# Altium PCB SAMV71_Xplained_Ultra.PcbDoc (part 1 of 7)
Units mm, origin at the board's own origin, x right, y up, seen from the top; angles counter-clockwise.
Board outline 90 x 135 mm, 8 copper layers (Top Layer LF-Signals, Ground Plane 1 (GND), Power Plane (VCC), Ground Plane 2 (GND), Signal Layer 1, Signal Layer 2, Ground Plane 3 (GND), Bottom Layer LF-Signals), stack 1.588 mm thick; 391 components, 330 nets, 1782 pads, 966 vias.
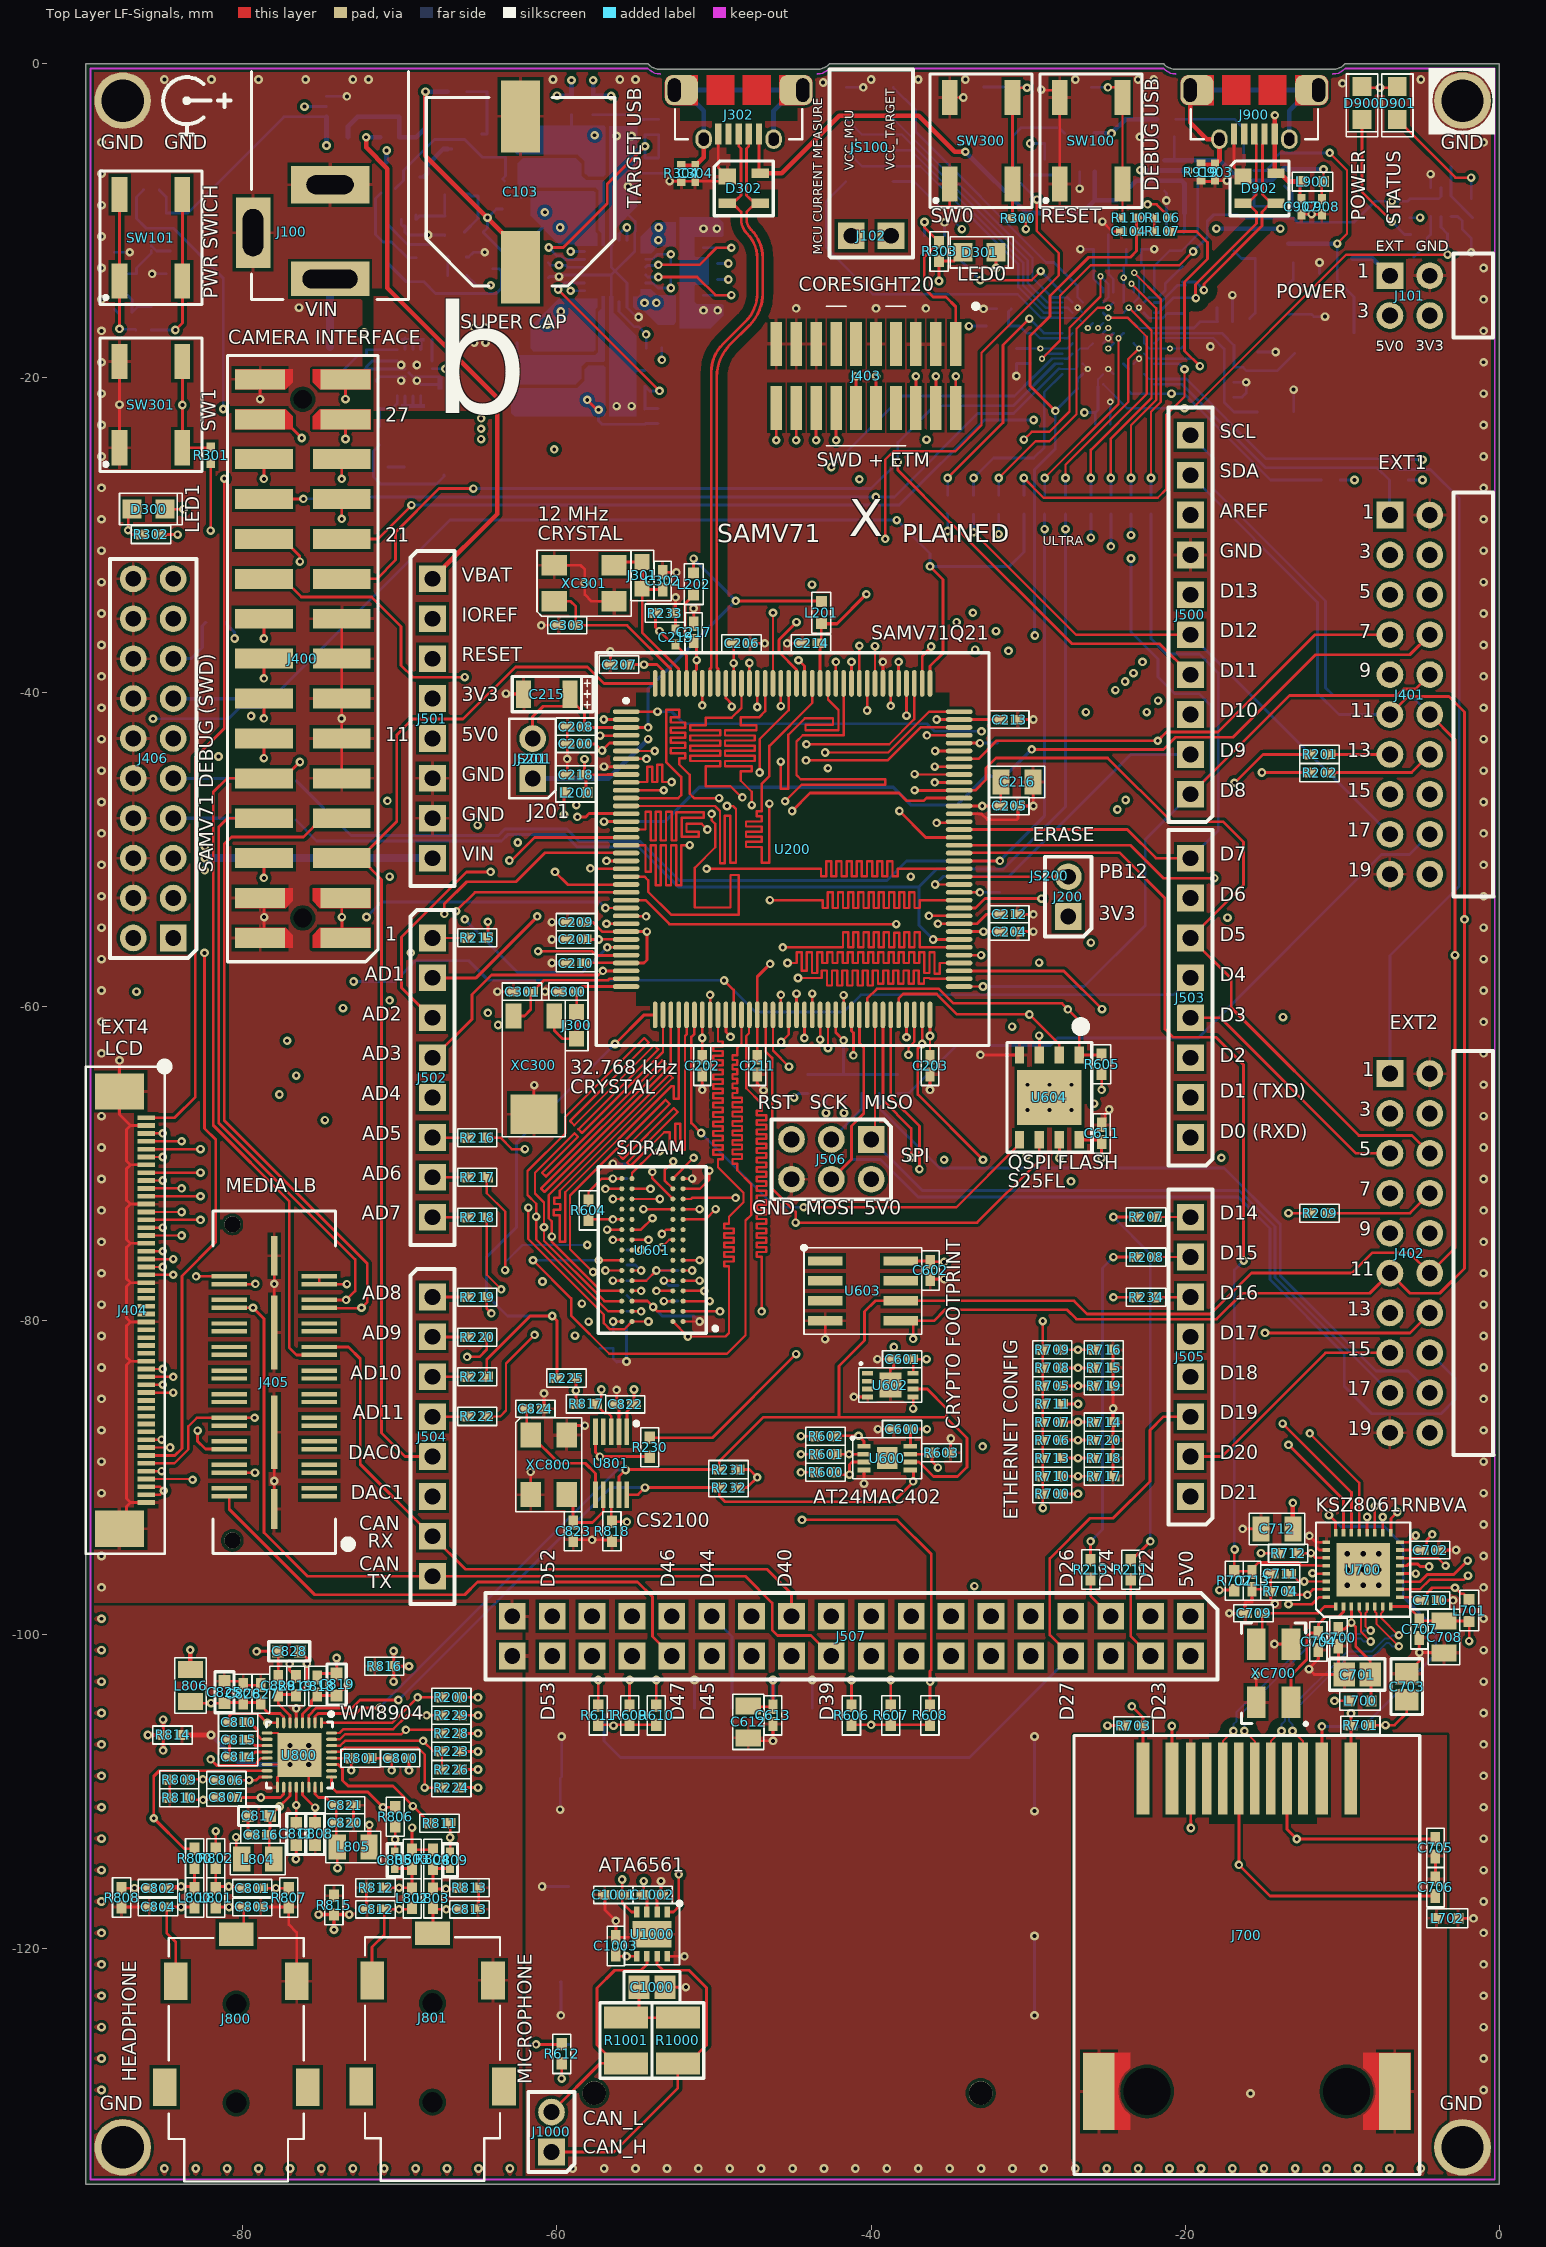
[diagram p0: Top Layer LF-Signals view]
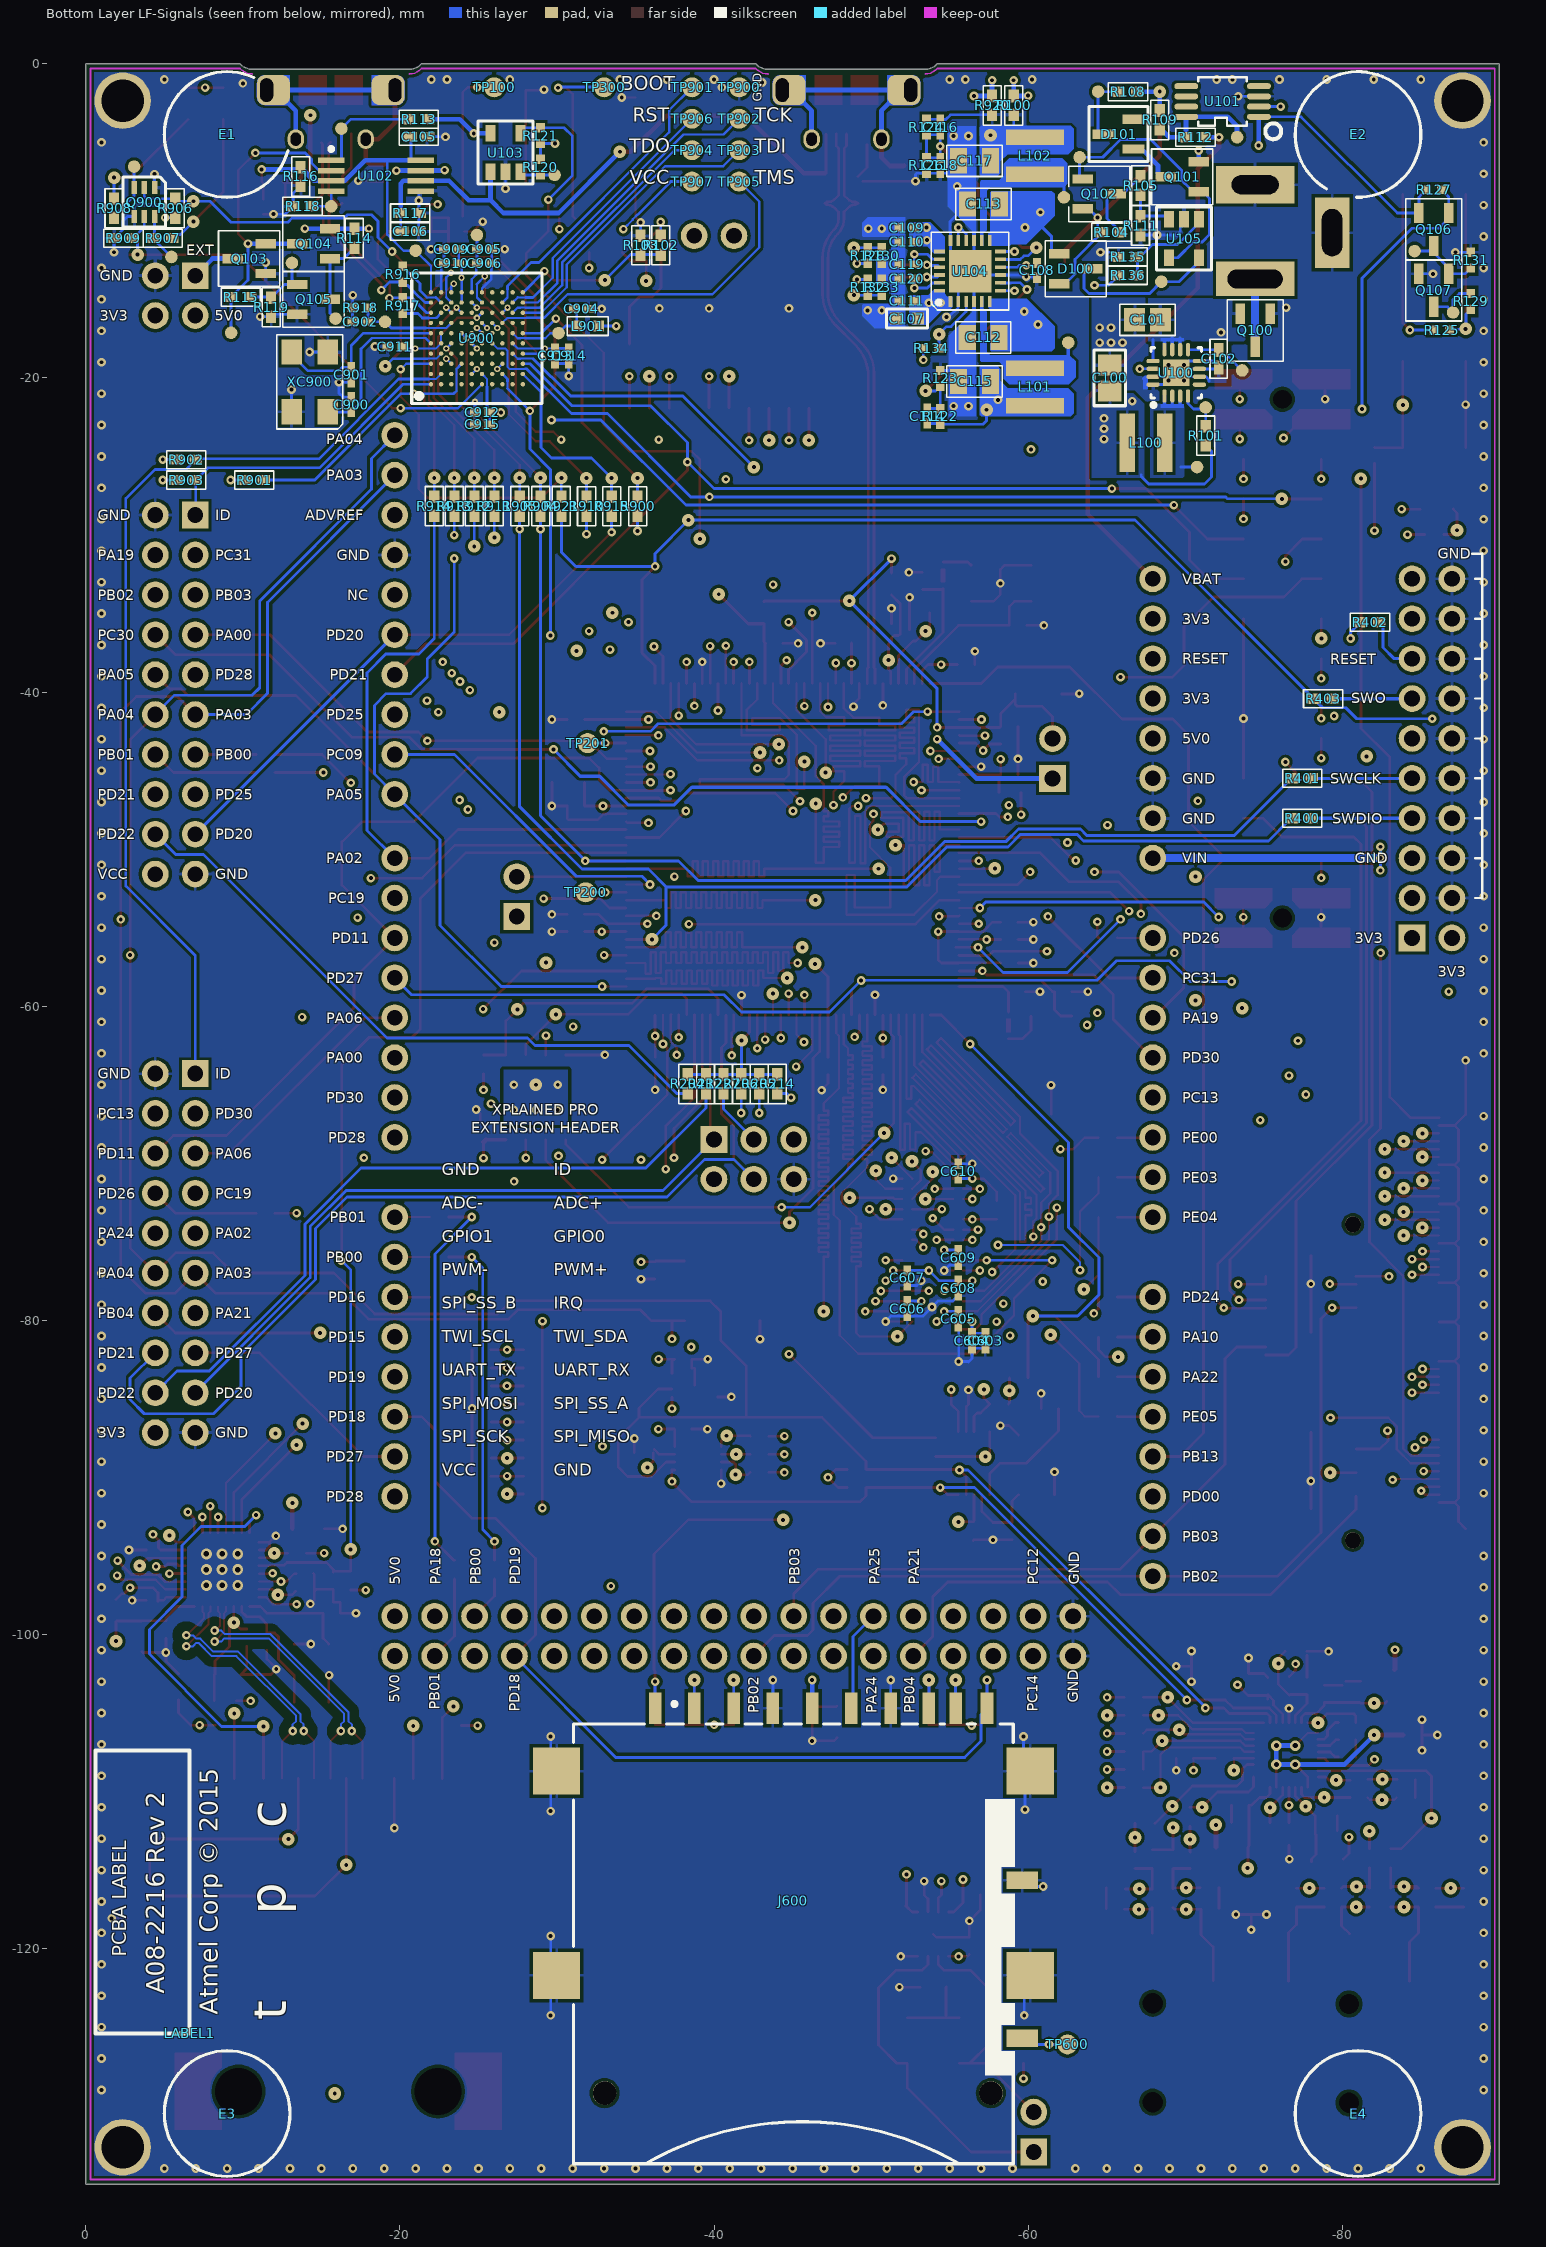
[diagram p1: Bottom Layer LF-Signals view, seen from below]
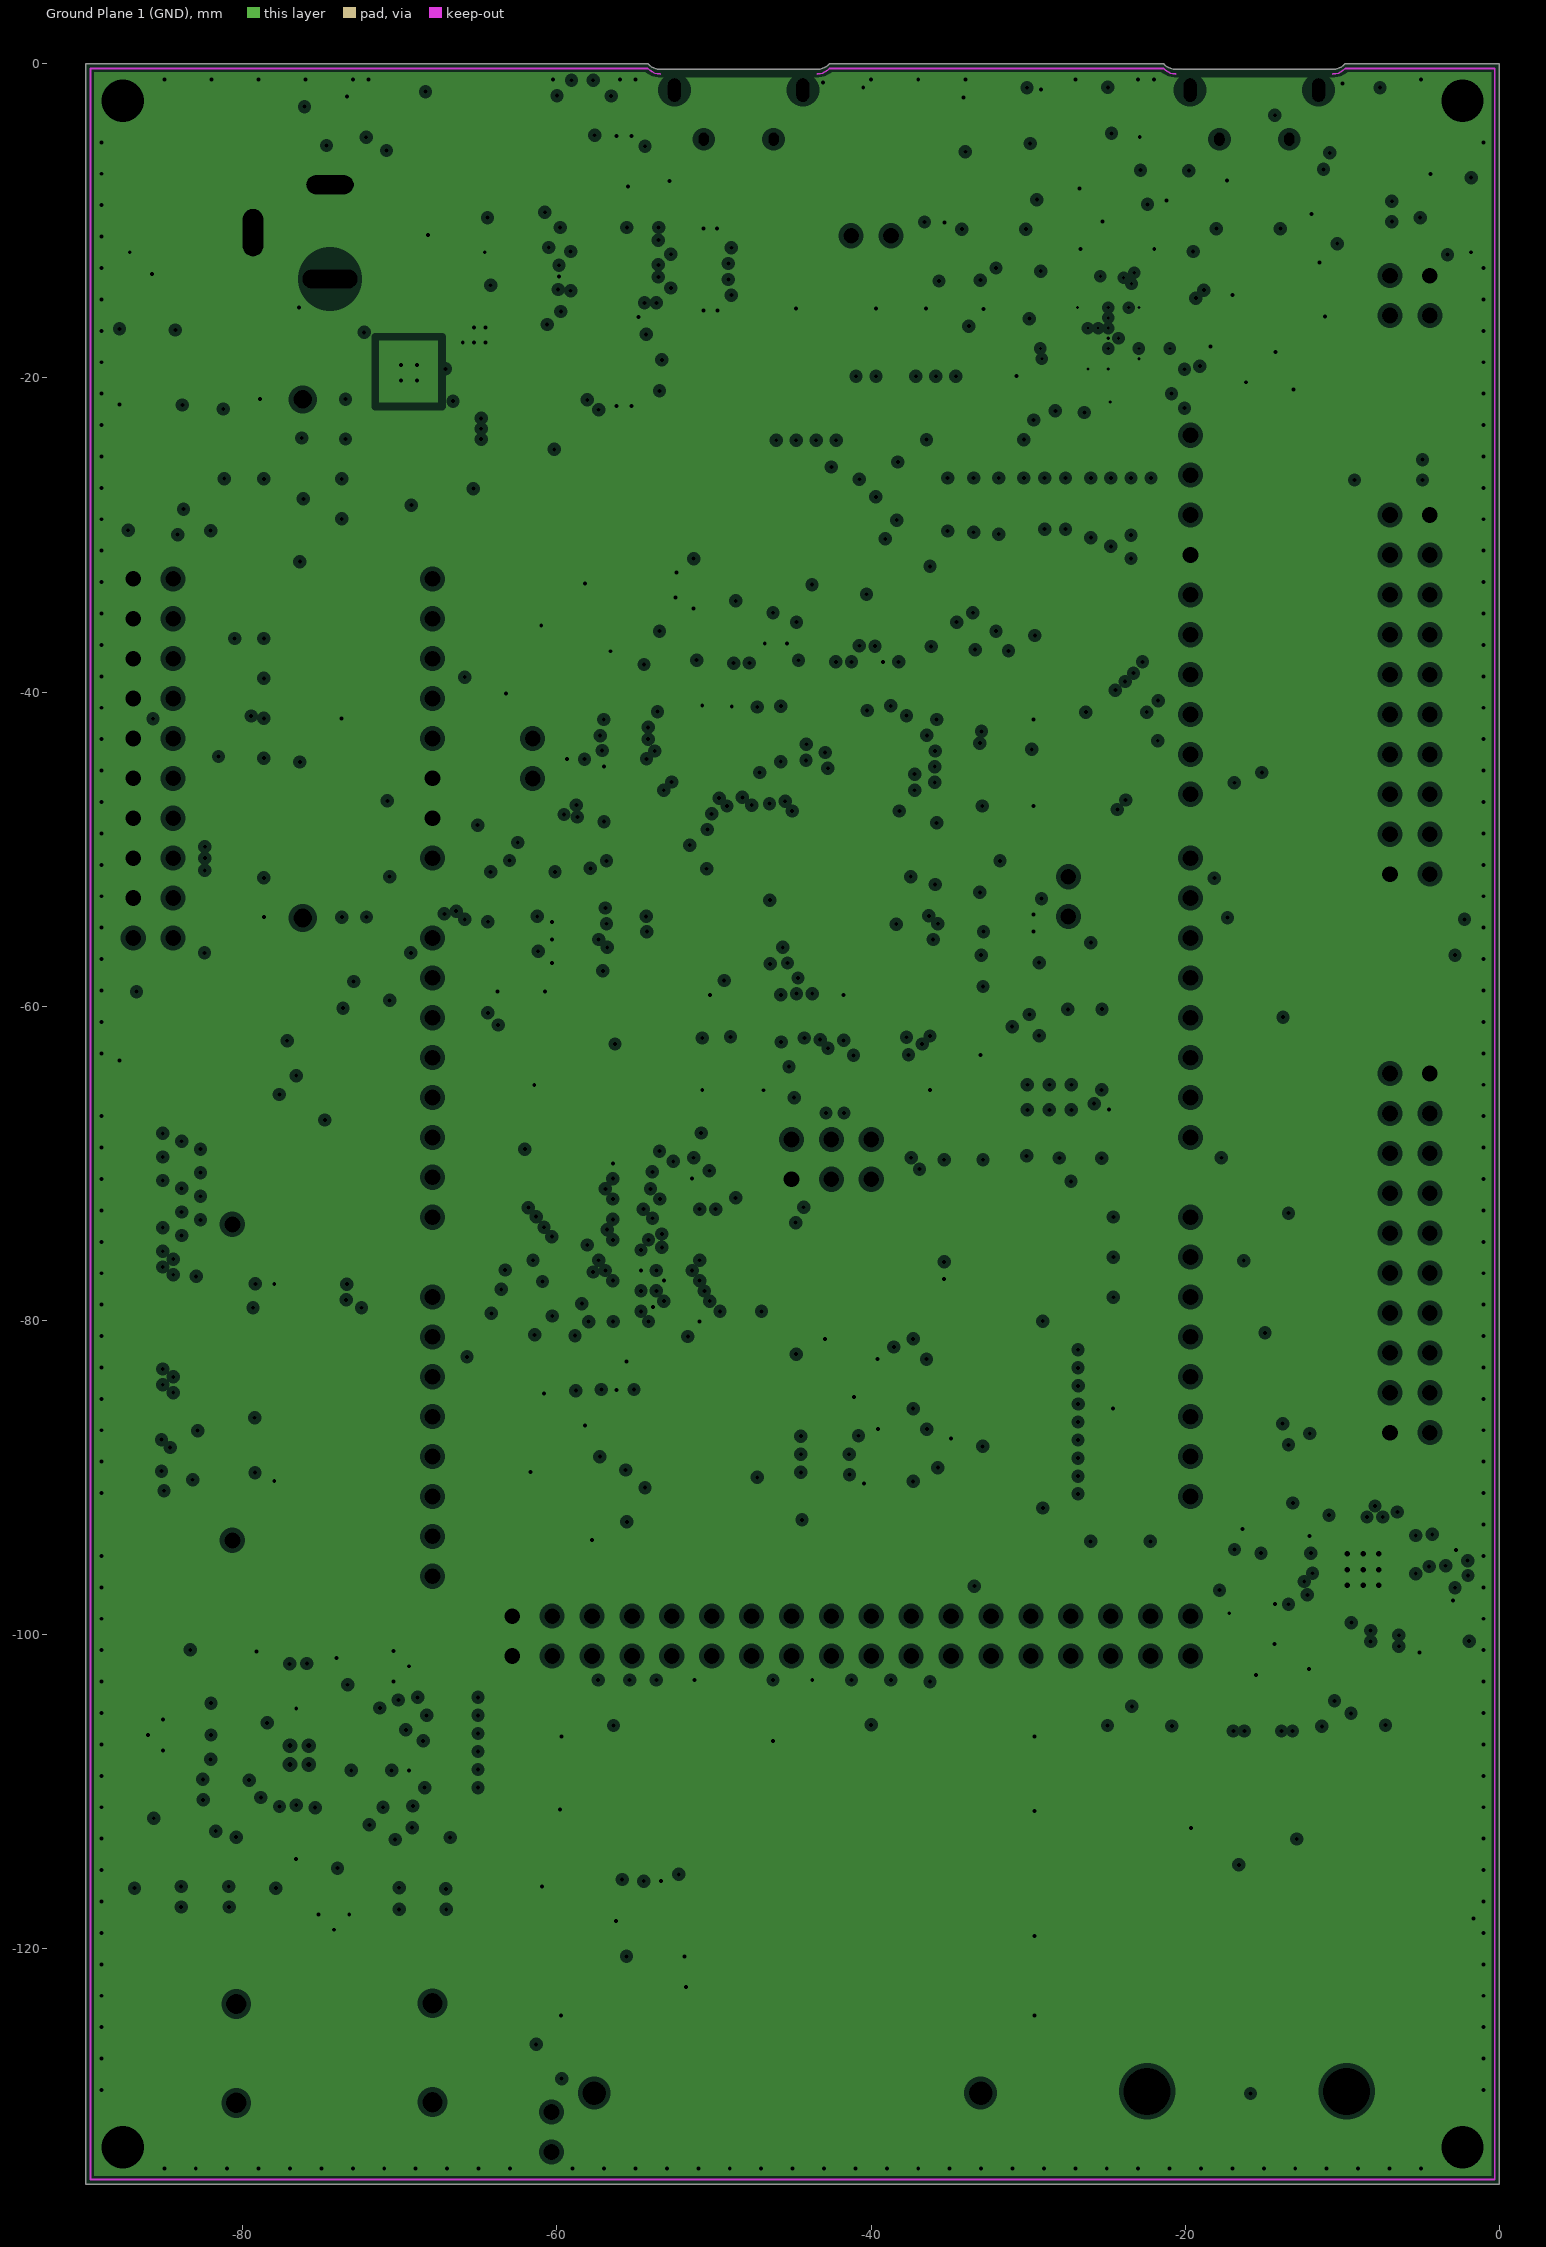
[diagram p2: Ground Plane 1 (GND), clearances drawn from the general rule]
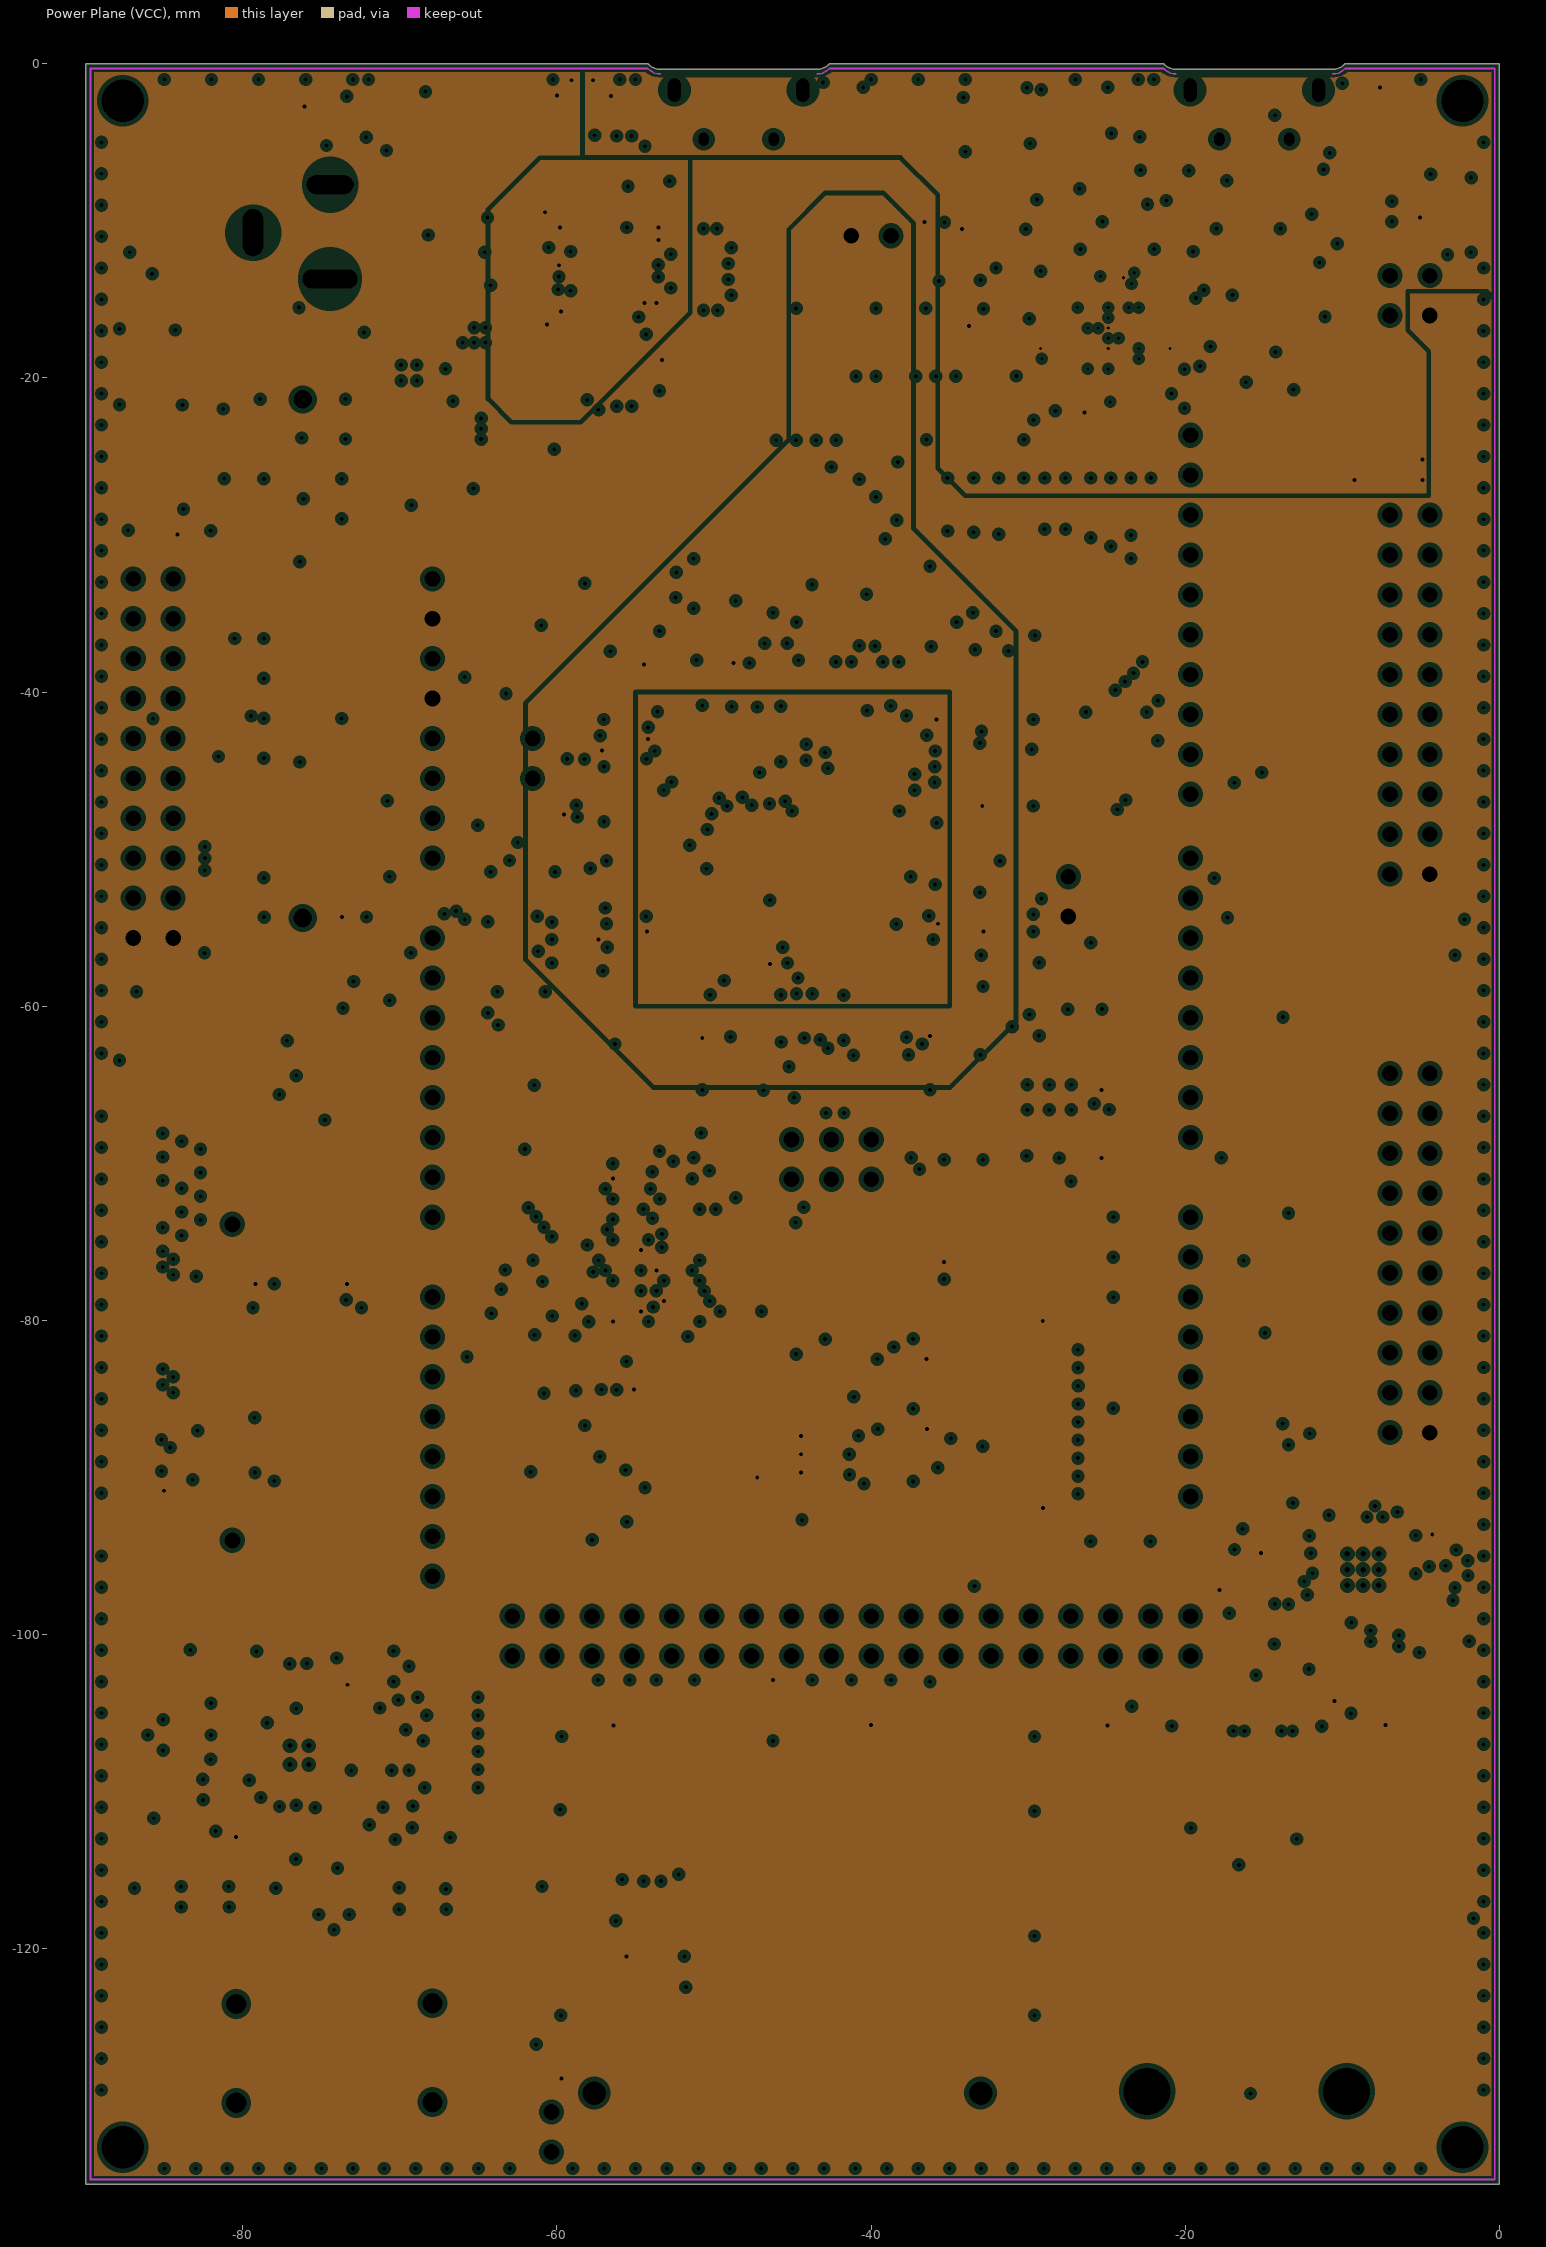
[diagram p3: Power Plane (VCC), clearances drawn from the general rule]
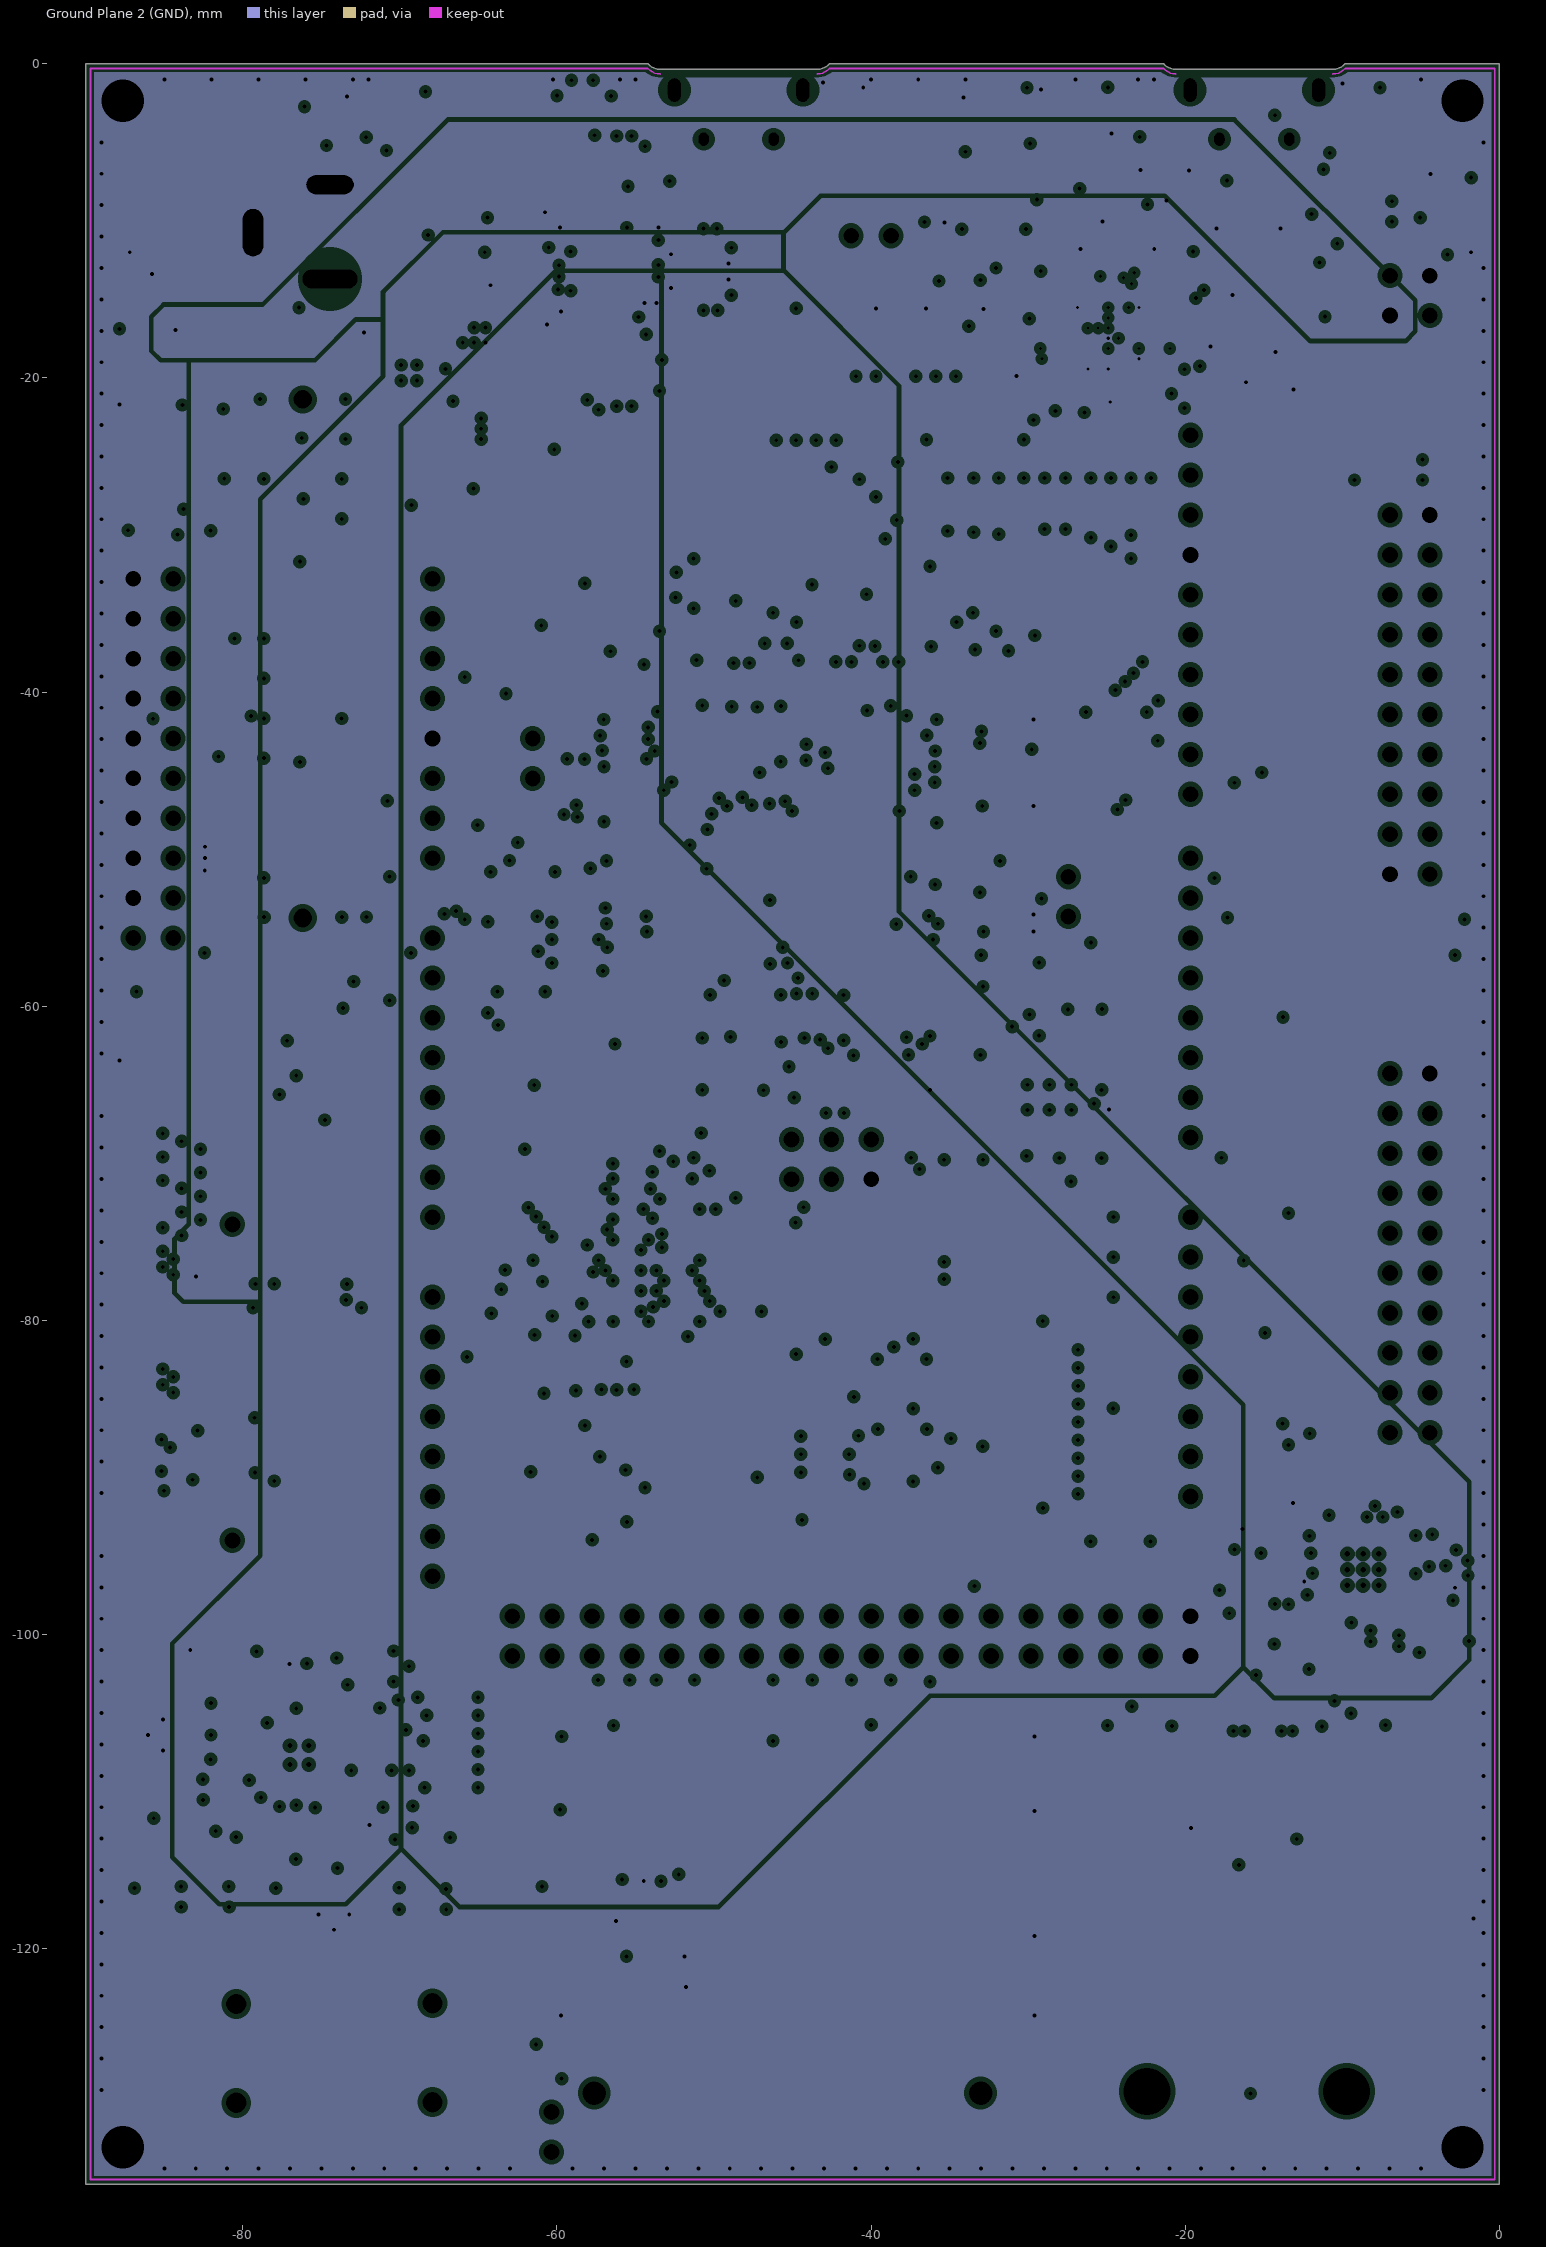
[diagram p4: Ground Plane 2 (GND), clearances drawn from the general rule]
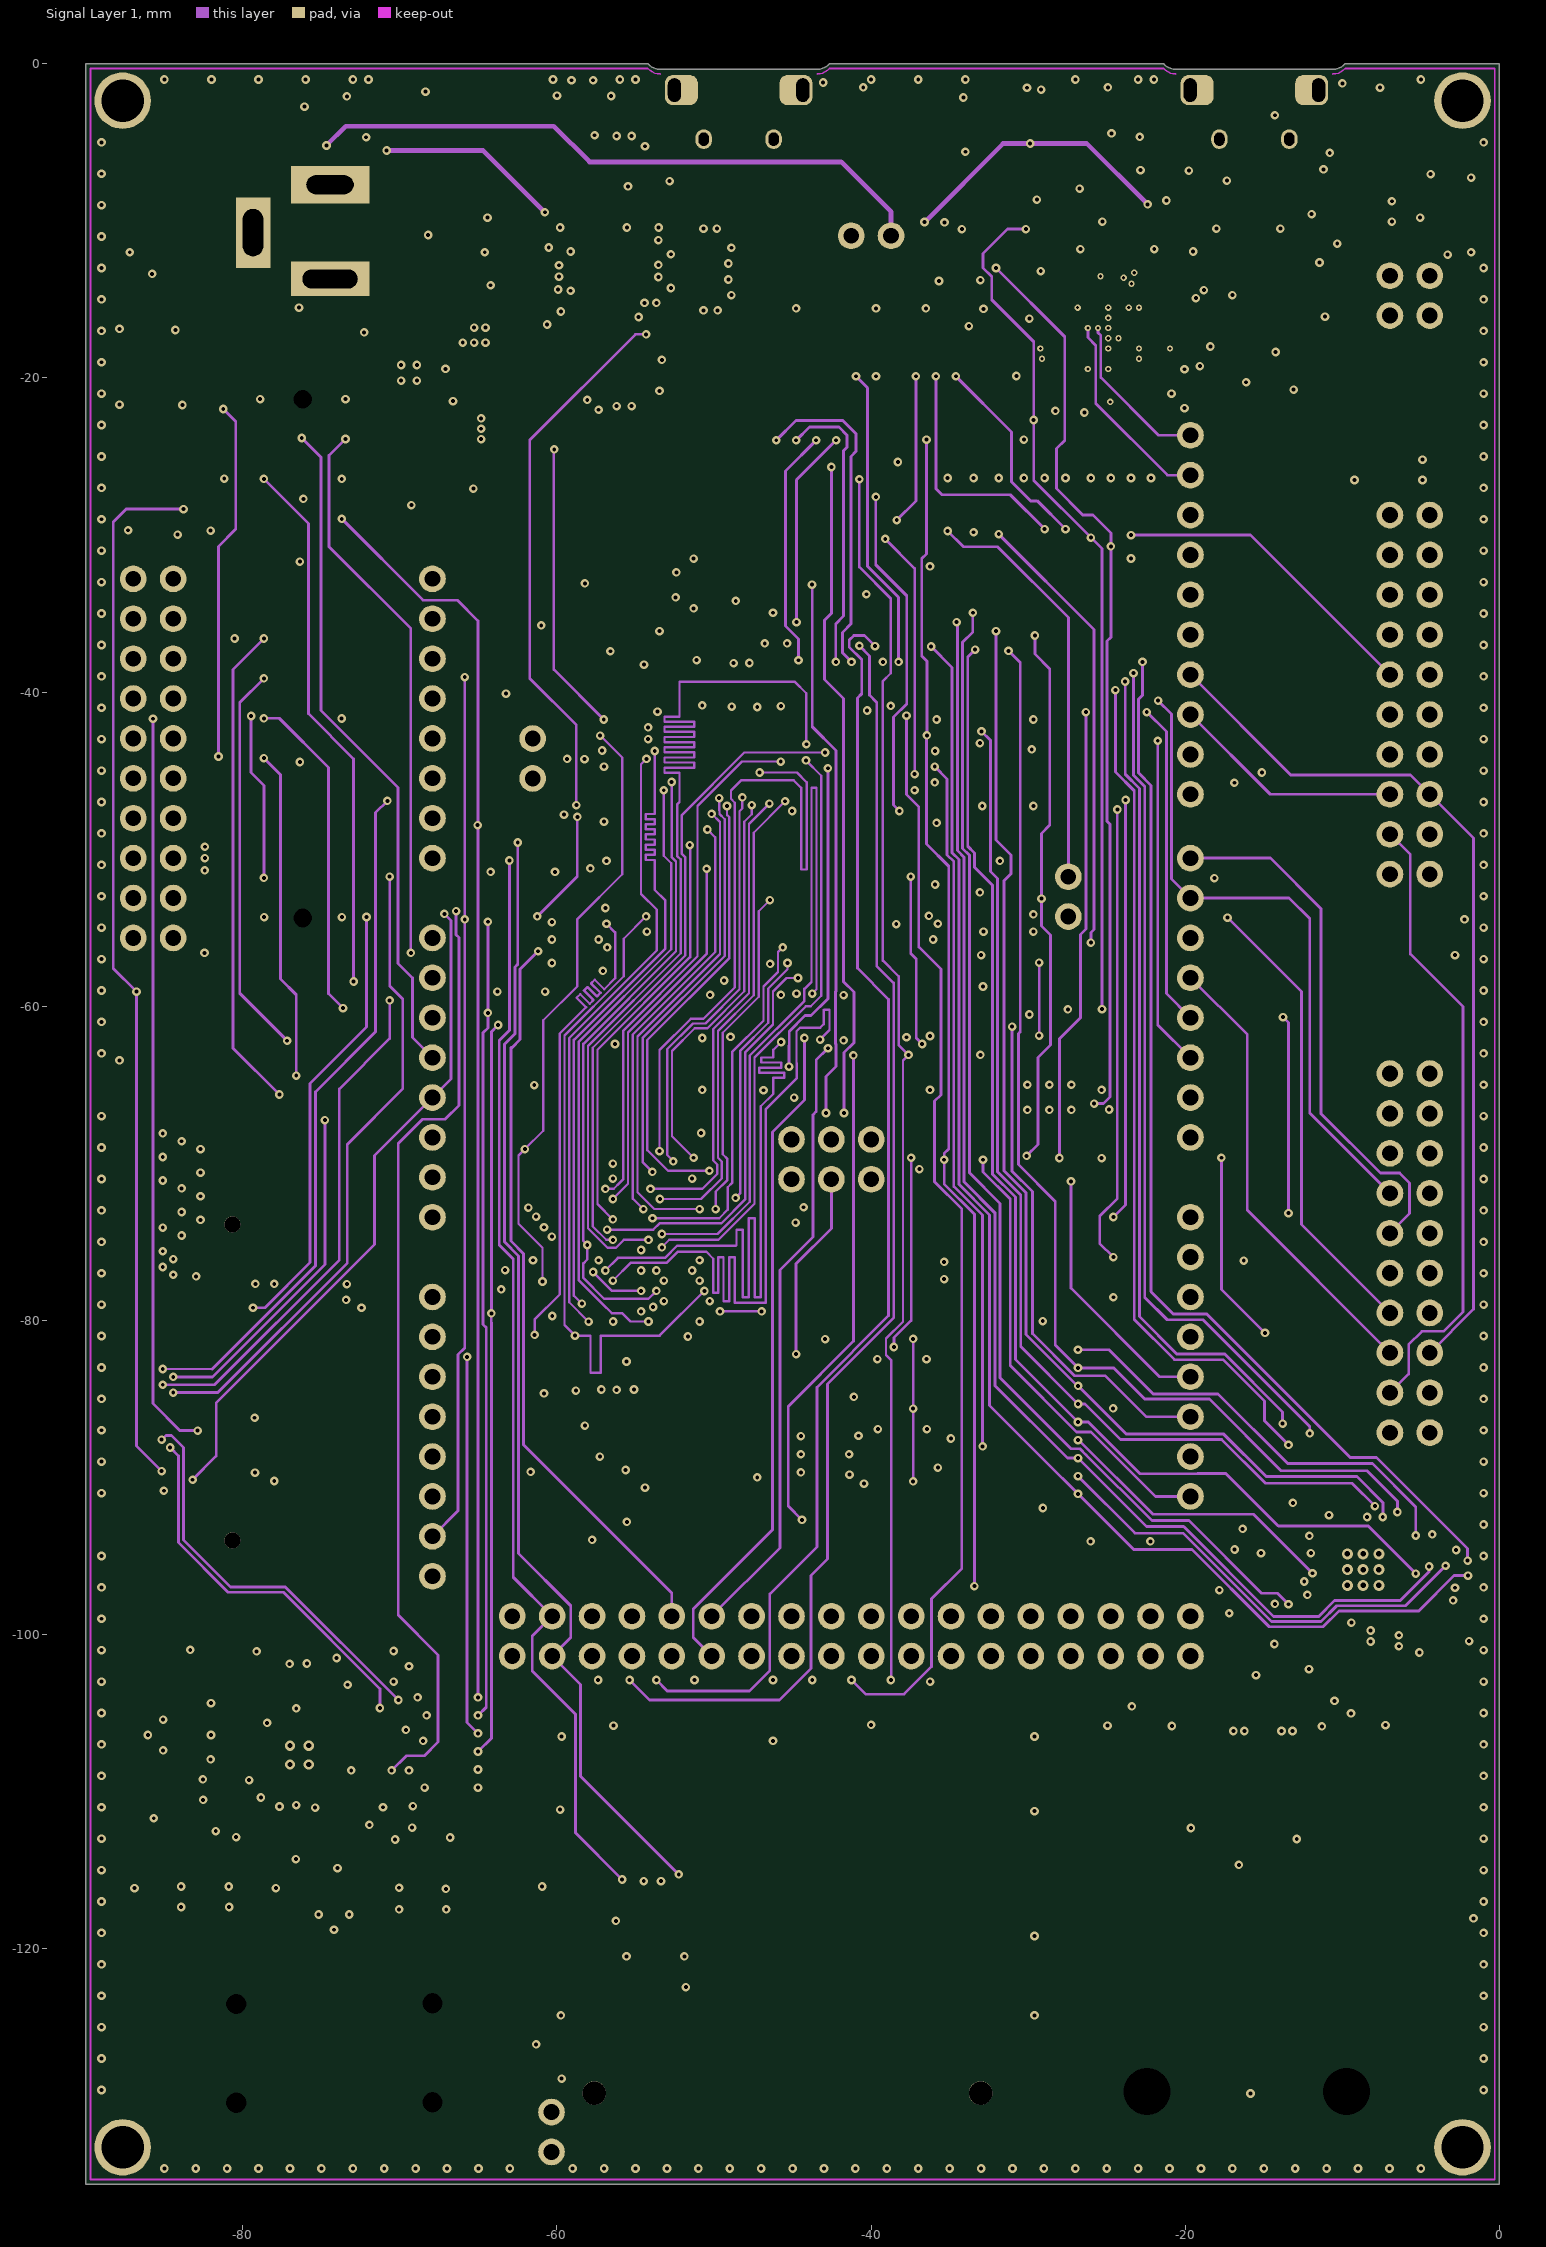
[diagram p5: Signal Layer 1]
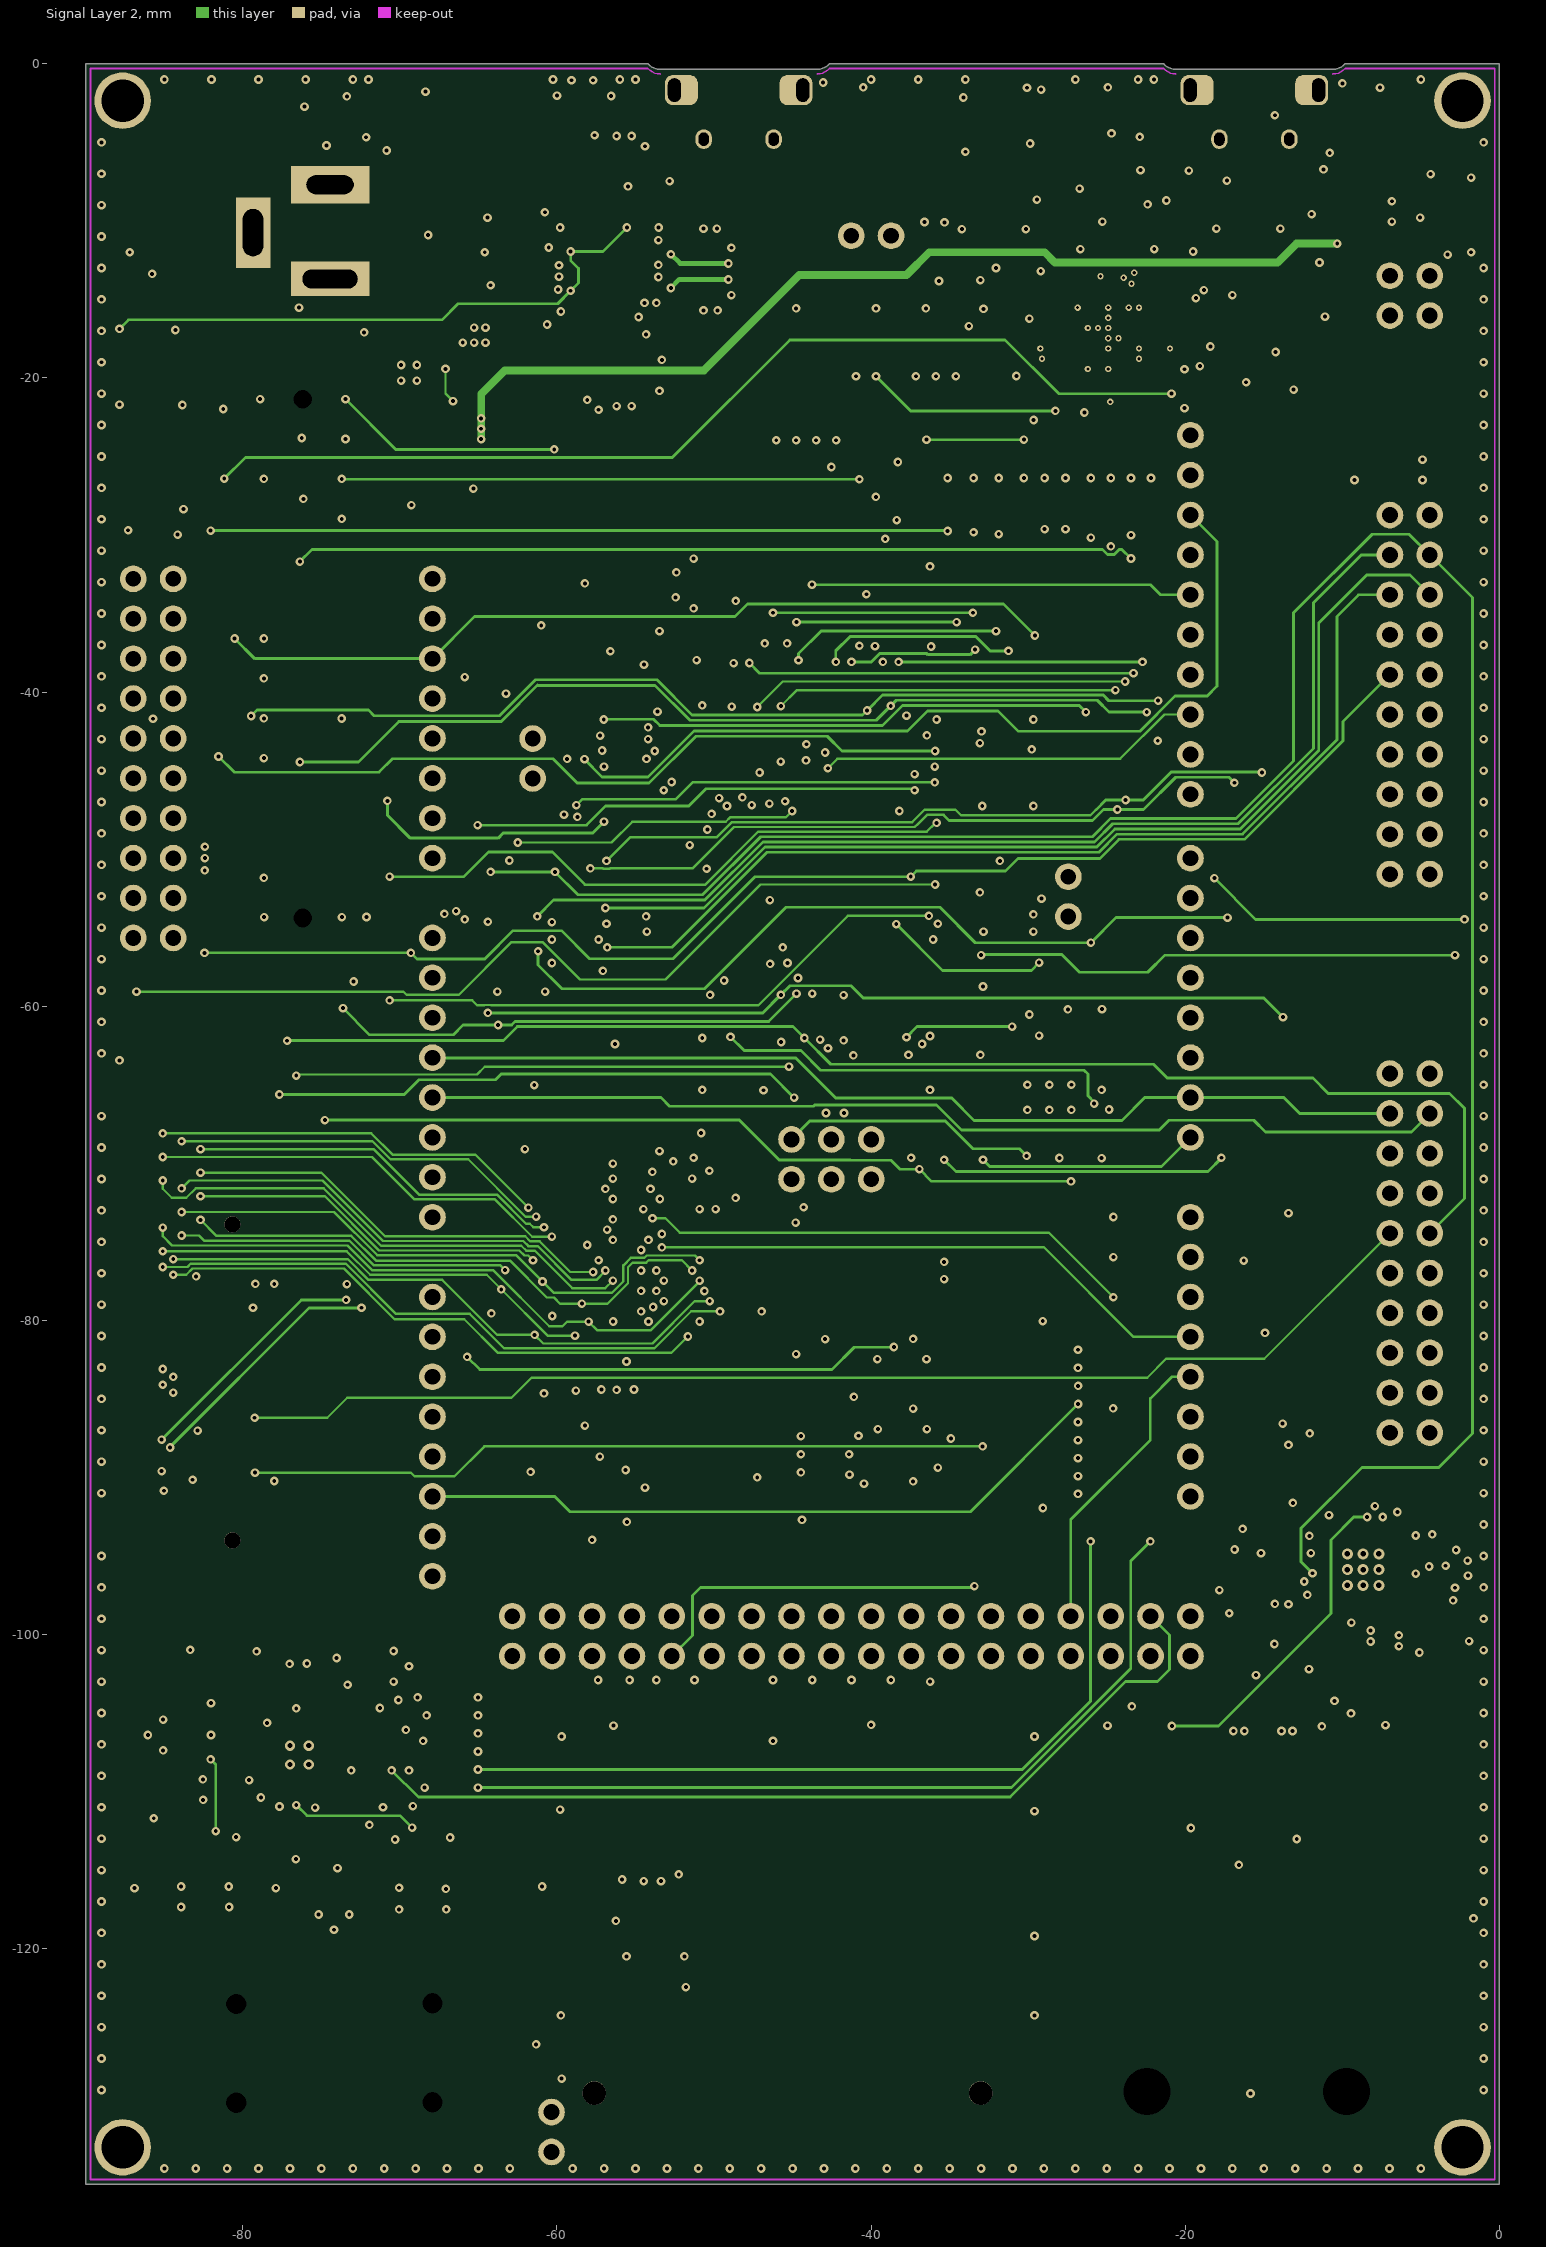
[diagram p6: Signal Layer 2]
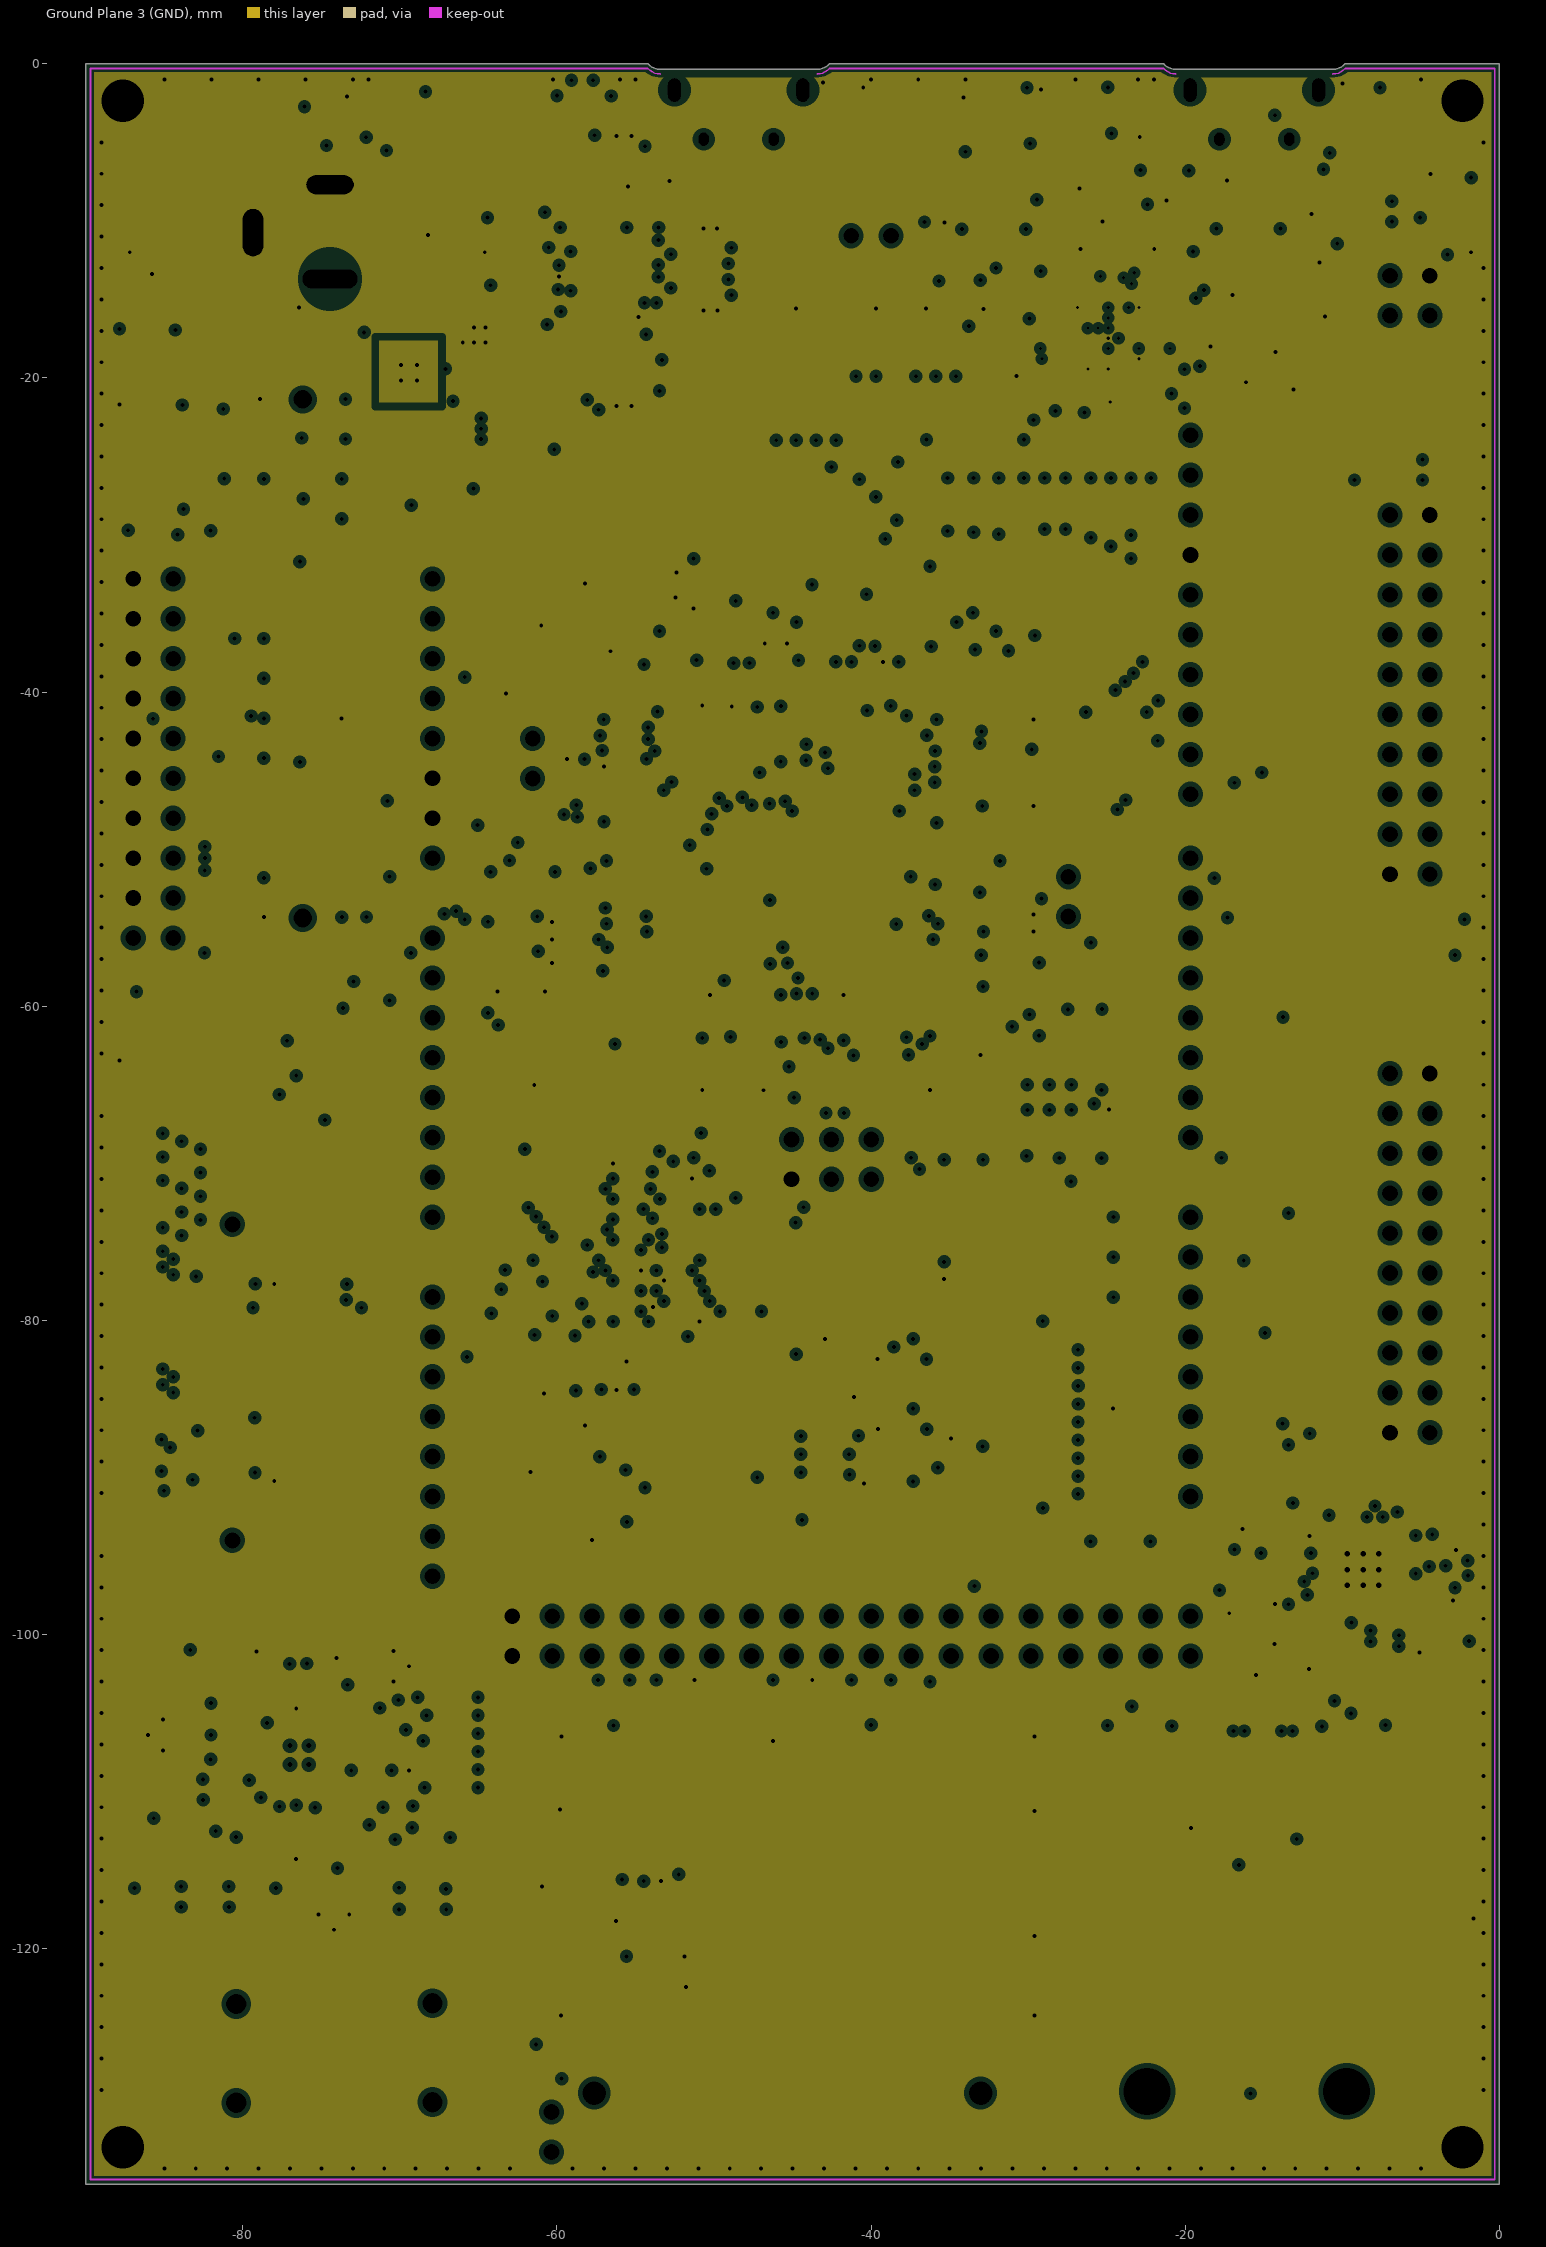
[diagram p7: Ground Plane 3 (GND), clearances drawn from the general rule]
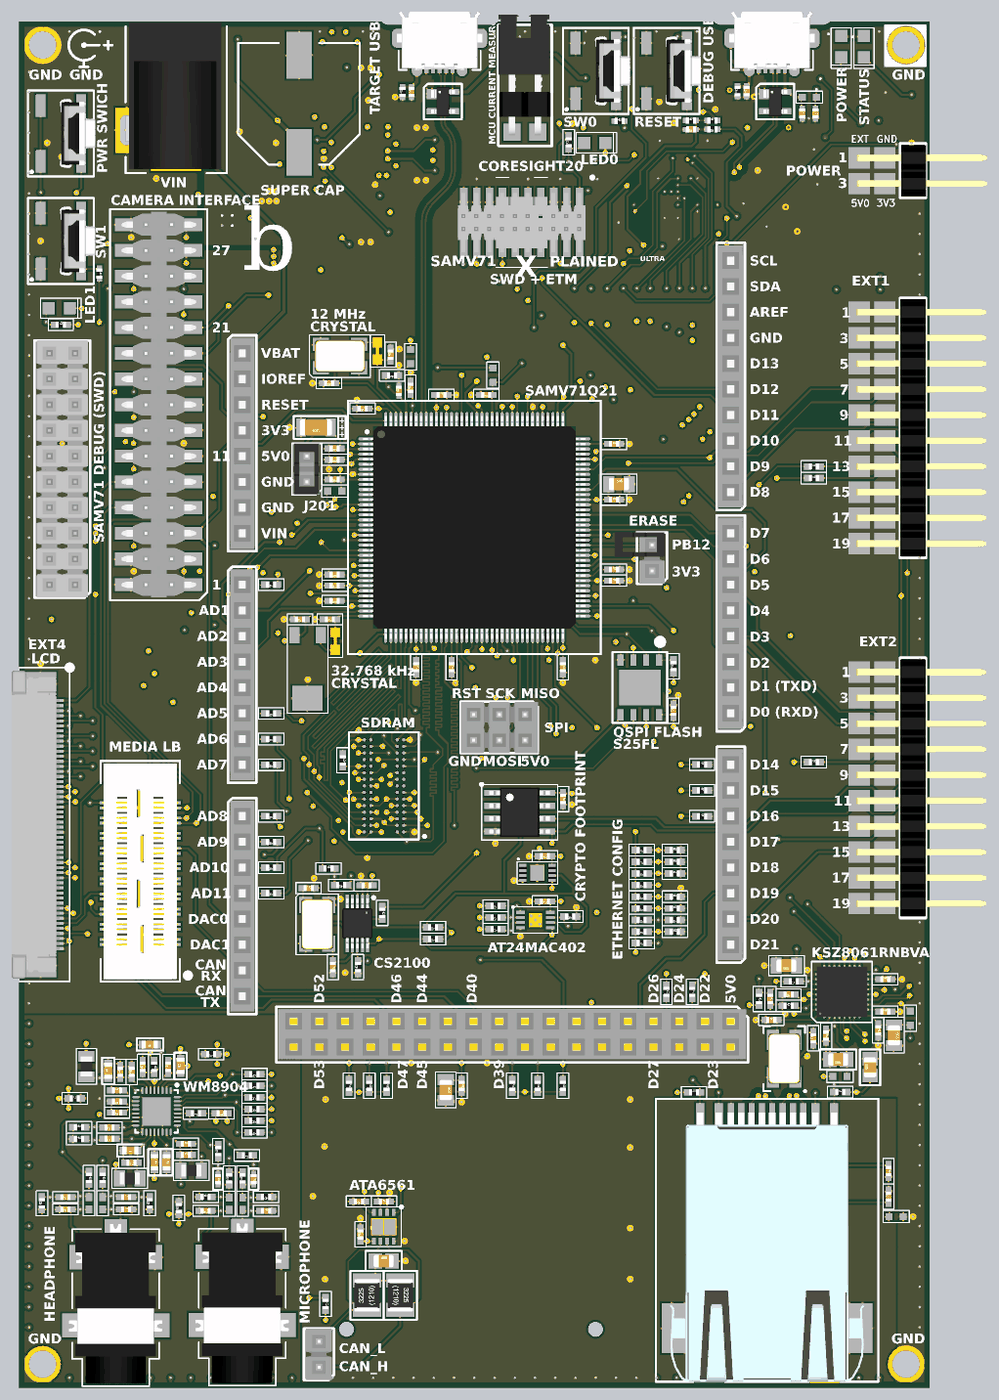
[diagram p14: 3D render of the assembled board from above, using the file's embedded part models]
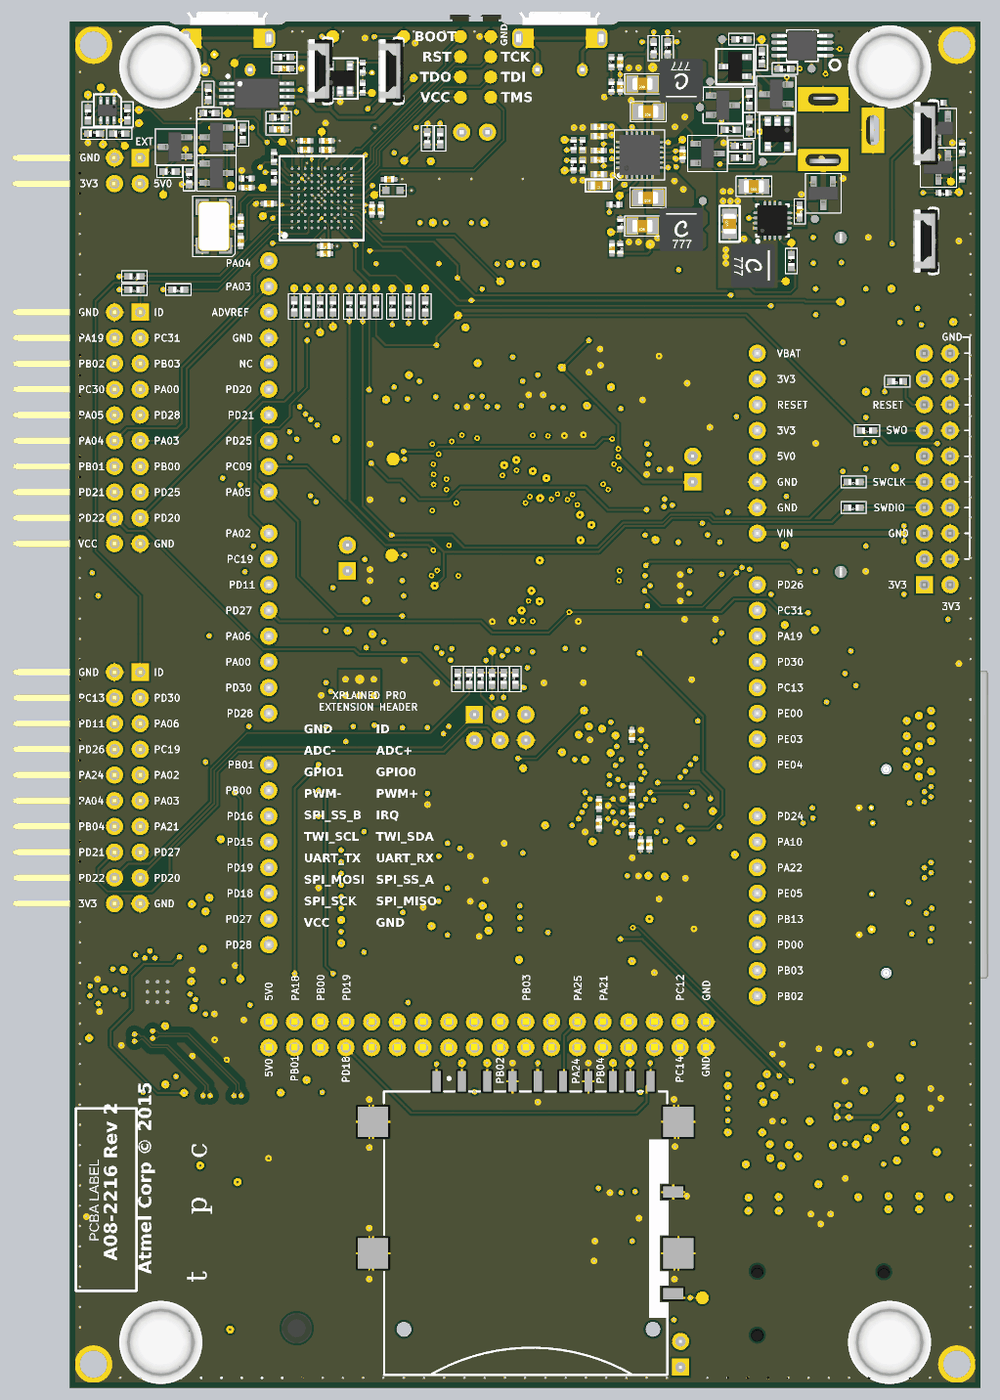
[diagram p15: 3D render of the assembled board from below, using the file's embedded part models]

## Layer stack, top to bottom
Top Solder: solder mask 0.0102, Solder Resist, Dk 3.5
Top Layer LF-Signals: signal copper 0.035
Dielectric 1: prepreg 0.114, 2116, Dk 4.2
Ground Plane 1 (GND): plane copper 0.035, net GND
Dielectric 2: core 0.2, FR-4, Dk 4.2
Power Plane (VCC): plane copper 0.035, net (Multiple Nets)
Dielectric 4: prepreg 0.166, Composite dielectric, Dk 4.15
Ground Plane 2 (GND): plane copper 0.035, net (Multiple Nets)
Dielectric 5: core 0.36, FR-4, Dk 4.2
Signal Layer 1: signal copper 0.035
Dielectric 7: prepreg 0.154, Composite dielectric, Dk 4.2
Signal Layer 2: signal copper 0.035
Dielectric 8: core 0.2, FR-4, Dk 4.2
Ground Plane 3 (GND): plane copper 0.035, net GND
Dielectric 9: prepreg 0.114, 2116, Dk 4.2
Bottom Layer LF-Signals: signal copper 0.035
Bottom Solder: solder mask 0.0102, Solder Resist, Dk 3.5

## Board outline
-90,-135 -90,0 -54.209,0 -54.209,-0.001 ccw(c-53.434,0.686) -53.434,-0.35 -43.434,-0.35 ccw(c-43.434,0.686) -42.659,-0.001 -42.659,0 -21.375,0 -21.375,-0.001 ccw(c-20.6,0.686) -20.6,-0.35 -10.6,-0.35 ccw(c-10.6,0.686) -9.825,-0.001 -9.825,0 0,0 0,-135

## Design rules (kind name [scope] priority, off if disabled: settings)
AcuteAngle [All] p1: minimum=7.00000000000000E+0001 checktracksonly=FALSE
AssemblyTestPointUsage "Schematic Assembly Testpoint Usage_41" [InNet('V-')] p1: valid=1
AssemblyTestPointUsage "Schematic Assembly Testpoint Usage_40" [InNet('NetQ102_3')] p2: valid=1
AssemblyTestPointUsage "Schematic Assembly Testpoint Usage_38" [InNet('NetD101_1')] p3: valid=1
AssemblyTestPointUsage "Schematic Assembly Testpoint Usage_37" [InNet('NetC1000_1')] p4: valid=1
AssemblyTestPointUsage "Schematic Assembly Testpoint Usage_36" [InNet('NetC815_1')] p5: valid=1
AssemblyTestPointUsage "Schematic Assembly Testpoint Usage_34" [InNet('NetC810_2')] p6: valid=1
AssemblyTestPointUsage "Schematic Assembly Testpoint Usage_39" [InNet('V+')] p7: valid=1
AssemblyTestPointUsage "Schematic Assembly Testpoint Usage_35" [InNet('NetC814_1')] p8: valid=1
AssemblyTestPointUsage "Schematic Assembly Testpoint Usage_31" [InNet('TX_P')] p9: valid=1
AssemblyTestPointUsage "Schematic Assembly Testpoint Usage_30" [InNet('TX_N')] p10: valid=1
AssemblyTestPointUsage "Schematic Assembly Testpoint Usage_29" [InNet('RX_P')] p11: valid=1
AssemblyTestPointUsage "Schematic Assembly Testpoint Usage_28" [InNet('RX_N')] p12: valid=1
AssemblyTestPointUsage "Schematic Assembly Testpoint Usage_27" [InNet('NetC704_2')] p13: valid=1
AssemblyTestPointUsage "Schematic Assembly Testpoint Usage_26" [InNet('NetC709_2')] p14: valid=1
AssemblyTestPointUsage "Schematic Assembly Testpoint Usage_25" [InNet('EDBG_USB_HS_P')] p15: valid=1
AssemblyTestPointUsage "Schematic Assembly Testpoint Usage_24" [InNet('EDBG_USB_HS_N')] p16: valid=1
AssemblyTestPointUsage "Schematic Assembly Testpoint Usage_23" [InNet('EDBG_USB_FS_P')] p17: valid=1
AssemblyTestPointUsage "Schematic Assembly Testpoint Usage_22" [InNet('EDBG_USB_FS_N')] p18: valid=1
AssemblyTestPointUsage "Schematic Assembly Testpoint Usage_33" [InNet('TARGET_USB_N')] p19: valid=1
AssemblyTestPointUsage "Schematic Assembly Testpoint Usage_32" [InNet('TARGET_USB_P')] p20: valid=1
AssemblyTestPointUsage "Schematic Assembly Testpoint Usage_21" [InNet('TARGET_USB_N')] p21: valid=1
AssemblyTestPointUsage "Schematic Assembly Testpoint Usage_17" [InNet('TARGET_USB_P')] p22: valid=1
AssemblyTestPointUsage "Schematic Assembly Testpoint Usage_16" [InNet('TX_P')] p23: valid=1
AssemblyTestPointUsage "Schematic Assembly Testpoint Usage_10" [InNet('TX_N')] p24: valid=1
AssemblyTestPointUsage "Schematic Assembly Testpoint Usage_9" [InNet('RX_P')] p25: valid=1
AssemblyTestPointUsage "Schematic Assembly Testpoint Usage_6" [InNet('RX_N')] p26: valid=1
AssemblyTestPointUsage "Schematic Assembly Testpoint Usage_5" [InNet('NetC704_2')] p27: valid=1
AssemblyTestPointUsage "Schematic Assembly Testpoint Usage_4" [InNet('NetC709_2')] p28: valid=1
AssemblyTestPointUsage "Schematic Assembly Testpoint Usage_3" [InNet('EDBG_USB_HS_P')] p29: valid=1
AssemblyTestPointUsage "Schematic Assembly Testpoint Usage_2" [InNet('EDBG_USB_HS_N')] p30: valid=1
AssemblyTestPointUsage "Schematic Assembly Testpoint Usage_1" [InNet('EDBG_USB_FS_P')] p31: valid=1
AssemblyTestPointUsage "Schematic Assembly Testpoint Usage" [InNet('EDBG_USB_FS_N')] p32: valid=1
AssemblyTestPointUsage "Schematic Assembly Testpoint Usage_8" [InNet('NetC823_1')] p33: valid=1
AssemblyTestPointUsage "Schematic Assembly Testpoint Usage_7" [InNet('NetC824_1')] p34: valid=1
AssemblyTestPointUsage "Schematic Assembly Testpoint Usage_20" [InNet('PA08_XOUT32')] p35: valid=1
AssemblyTestPointUsage "Schematic Assembly Testpoint Usage_19" [InNet('PA07_XIN32')] p36: valid=1
AssemblyTestPointUsage "Schematic Assembly Testpoint Usage_18" [InNet('PB09_XIN')] p37: valid=1
AssemblyTestPointUsage "Schematic Assembly Testpoint Usage_14" [InNet('NetJ301_1')] p38: valid=1
AssemblyTestPointUsage "Schematic Assembly Testpoint Usage_13" [InNet('NetJ300_1')] p39: valid=1
AssemblyTestPointUsage "Schematic Assembly Testpoint Usage_12" [InNet('XOUT0')] p40: valid=1
AssemblyTestPointUsage "Schematic Assembly Testpoint Usage_11" [InNet('XIN0')] p41: valid=1
AssemblyTestPointUsage "Schematic Assembly Testpoint Usage_15" [InNet('PB08_XOUT')] p42: valid=1
AssemblyTestPointUsage [All] p43:
AssemblyTestpoint [All] p1: testpointundercomponent=TRUE minsize=0.8 maxsize=10 preferedsize=0.8 minholesize=0 maxholesize=2 preferedholesize=0.25 testpointgrid=0.025 usegrid=FALSE gridtolerance=0 allowsidebottom=TRUE minspacing=1.27 compbodyclearance=0.127
Clearance Clearance_Poly_Impedance [IsRegion vs InDifferentialPairClass('All Differential Pairs')] p1: gap=0.6
Clearance Clearance_Poly [IsRegion] p2: gap=0.2
Clearance Clearance_EDBG [(WithinRoom('EDBG_Room') OR InNet('EDBG_USB_FS_N') OR InNet('EDBG_USB_FS_P'))] p3: gap=0.119
Clearance [All] p4: gap=0.15
ComponentClearance [All] p1: gap=0.1 collisioncheckmode=3 verticalgap=0.1 showdistances=FALSE
DiffPairsRouting DiffPairsRouting_100diff [InDifferentialPair('RX') OR InDifferentialPair('TX')] p1: maxlimit=0.2 minlimit=0.15 mostfreqgap=0.15 toplayer_minwidth=0.127 toplayer_maxwidth=0.13 toplayer_prefwidth=0.127 midlayer1_minwidth=0.127 midlayer1_maxwidth=0.13 midlayer1_prefwidth=0.127 midlayer2_minwidth=0.127 midlayer2_maxwidth=0.13 midlayer2_prefwidth=0.127 bottomlayer_minwidth=0.127 bottomlayer_maxwidth=0.13 bottomlayer_prefwidth=0.127 maxuncoupledlength=20
DiffPairsRouting DiffPairsRouting_90diff [InDifferentialPair('TARGET_USB') OR InDifferentialPair('EDBG_USB_HS')] p2: maxlimit=0.2 minlimit=0.173 mostfreqgap=0.173 toplayer_minwidth=0.175 toplayer_maxwidth=0.18 toplayer_prefwidth=0.175 midlayer1_minwidth=0.175 midlayer1_maxwidth=0.18 midlayer1_prefwidth=0.175 midlayer2_minwidth=0.175 midlayer2_maxwidth=0.18 midlayer2_prefwidth=0.175 bottomlayer_minwidth=0.175 bottomlayer_maxwidth=0.18 bottomlayer_prefwidth=0.175 maxuncoupledlength=20
DiffPairsRouting [All] p3: maxlimit=0.22 minlimit=0.18 mostfreqgap=0.2 toplayer_minwidth=0.125 toplayer_maxwidth=0.2 toplayer_prefwidth=0.18 midlayer1_minwidth=0.125 midlayer1_maxwidth=0.2 midlayer1_prefwidth=0.18 midlayer2_minwidth=0.125 midlayer2_maxwidth=0.2 midlayer2_prefwidth=0.18 bottomlayer_minwidth=0.125 bottomlayer_maxwidth=0.2 bottomlayer_prefwidth=0.18 maxuncoupledlength=20
FabricationTestPointUsage "Schematic Fabrication Testpoint Usage_41" [InNet('V-')] p1: valid=1 allowmultiple=FALSE
FabricationTestPointUsage "Schematic Fabrication Testpoint Usage_40" [InNet('NetC1000_1')] p2: valid=1 allowmultiple=FALSE
FabricationTestPointUsage "Schematic Fabrication Testpoint Usage_39" [InNet('NetQ102_3')] p3: valid=1 allowmultiple=FALSE
FabricationTestPointUsage "Schematic Fabrication Testpoint Usage_37" [InNet('NetD101_1')] p4: valid=1 allowmultiple=FALSE
FabricationTestPointUsage "Schematic Fabrication Testpoint Usage_36" [InNet('NetC810_2')] p5: valid=1 allowmultiple=FALSE
FabricationTestPointUsage "Schematic Fabrication Testpoint Usage_38" [InNet('V+')] p6: valid=1 allowmultiple=FALSE
FabricationTestPointUsage "Schematic Fabrication Testpoint Usage_35" [InNet('NetC814_1')] p7: valid=1 allowmultiple=FALSE
FabricationTestPointUsage "Schematic Fabrication Testpoint Usage_34" [InNet('NetC815_1')] p8: valid=1 allowmultiple=FALSE
FabricationTestPointUsage "Schematic Fabrication Testpoint Usage_31" [InNet('TX_P')] p9: valid=1 allowmultiple=FALSE
FabricationTestPointUsage "Schematic Fabrication Testpoint Usage_30" [InNet('TX_N')] p10: valid=1 allowmultiple=FALSE
FabricationTestPointUsage "Schematic Fabrication Testpoint Usage_29" [InNet('RX_P')] p11: valid=1 allowmultiple=FALSE
FabricationTestPointUsage "Schematic Fabrication Testpoint Usage_28" [InNet('RX_N')] p12: valid=1 allowmultiple=FALSE
FabricationTestPointUsage "Schematic Fabrication Testpoint Usage_27" [InNet('NetC704_2')] p13: valid=1 allowmultiple=FALSE
FabricationTestPointUsage "Schematic Fabrication Testpoint Usage_26" [InNet('NetC709_2')] p14: valid=1 allowmultiple=FALSE
FabricationTestPointUsage "Schematic Fabrication Testpoint Usage_25" [InNet('EDBG_USB_HS_P')] p15: valid=1 allowmultiple=FALSE
FabricationTestPointUsage "Schematic Fabrication Testpoint Usage_24" [InNet('EDBG_USB_HS_N')] p16: valid=1 allowmultiple=FALSE
FabricationTestPointUsage "Schematic Fabrication Testpoint Usage_23" [InNet('EDBG_USB_FS_P')] p17: valid=1 allowmultiple=FALSE
FabricationTestPointUsage "Schematic Fabrication Testpoint Usage_22" [InNet('EDBG_USB_FS_N')] p18: valid=1 allowmultiple=FALSE
FabricationTestPointUsage "Schematic Fabrication Testpoint Usage_33" [InNet('TARGET_USB_N')] p19: valid=1 allowmultiple=FALSE
FabricationTestPointUsage "Schematic Fabrication Testpoint Usage_32" [InNet('TARGET_USB_P')] p20: valid=1 allowmultiple=FALSE
FabricationTestPointUsage "Schematic Fabrication Testpoint Usage_20" [InNet('TARGET_USB_N')] p21: valid=1 allowmultiple=FALSE
FabricationTestPointUsage "Schematic Fabrication Testpoint Usage_17" [InNet('TARGET_USB_P')] p22: valid=1 allowmultiple=FALSE
FabricationTestPointUsage "Schematic Fabrication Testpoint Usage_11" [InNet('TX_P')] p23: valid=1 allowmultiple=FALSE
FabricationTestPointUsage "Schematic Fabrication Testpoint Usage_10" [InNet('TX_N')] p24: valid=1 allowmultiple=FALSE
FabricationTestPointUsage "Schematic Fabrication Testpoint Usage_9" [InNet('RX_P')] p25: valid=1 allowmultiple=FALSE
FabricationTestPointUsage "Schematic Fabrication Testpoint Usage_8" [InNet('RX_N')] p26: valid=1 allowmultiple=FALSE
FabricationTestPointUsage "Schematic Fabrication Testpoint Usage_7" [InNet('NetC704_2')] p27: valid=1 allowmultiple=FALSE
FabricationTestPointUsage "Schematic Fabrication Testpoint Usage_4" [InNet('NetC709_2')] p28: valid=1 allowmultiple=FALSE
FabricationTestPointUsage "Schematic Fabrication Testpoint Usage_3" [InNet('EDBG_USB_HS_P')] p29: valid=1 allowmultiple=FALSE
FabricationTestPointUsage "Schematic Fabrication Testpoint Usage_2" [InNet('EDBG_USB_HS_N')] p30: valid=1 allowmultiple=FALSE
FabricationTestPointUsage "Schematic Fabrication Testpoint Usage_1" [InNet('EDBG_USB_FS_P')] p31: valid=1 allowmultiple=FALSE
FabricationTestPointUsage "Schematic Fabrication Testpoint Usage" [InNet('EDBG_USB_FS_N')] p32: valid=1 allowmultiple=FALSE
FabricationTestPointUsage "Schematic Fabrication Testpoint Usage_6" [InNet('NetC823_1')] p33: valid=1 allowmultiple=FALSE
FabricationTestPointUsage "Schematic Fabrication Testpoint Usage_5" [InNet('NetC824_1')] p34: valid=1 allowmultiple=FALSE
FabricationTestPointUsage "Schematic Fabrication Testpoint Usage_21" [InNet('PA08_XOUT32')] p35: valid=1 allowmultiple=FALSE
FabricationTestPointUsage "Schematic Fabrication Testpoint Usage_19" [InNet('PA07_XIN32')] p36: valid=1 allowmultiple=FALSE
FabricationTestPointUsage "Schematic Fabrication Testpoint Usage_18" [InNet('PB09_XIN')] p37: valid=1 allowmultiple=FALSE
FabricationTestPointUsage "Schematic Fabrication Testpoint Usage_16" [InNet('NetJ301_1')] p38: valid=1 allowmultiple=FALSE
FabricationTestPointUsage "Schematic Fabrication Testpoint Usage_14" [InNet('NetJ300_1')] p39: valid=1 allowmultiple=FALSE
FabricationTestPointUsage "Schematic Fabrication Testpoint Usage_13" [InNet('XOUT0')] p40: valid=1 allowmultiple=FALSE
FabricationTestPointUsage "Schematic Fabrication Testpoint Usage_12" [InNet('XIN0')] p41: valid=1 allowmultiple=FALSE
FabricationTestPointUsage "Schematic Fabrication Testpoint Usage_15" [InNet('PB08_XOUT')] p42: valid=1 allowmultiple=FALSE
FabricationTestPointUsage TestPointUsage [All] p43: valid=0 allowmultiple=FALSE
FabricationTestpoint Testpoint [All] p1: side=2 testpointundercomponent=TRUE minsize=0.55 maxsize=10 preferedsize=0.8 minholesize=0 maxholesize=2 preferedholesize=0.25 testpointgrid=0 allowsidebottom=TRUE usegrid=FALSE gridtolerance=0 minspacing=1.27 compbodyclearance=0.127
HoleSize [All] p1: absolutevalues=TRUE maxlimit=10 minlimit=0.2 maxpercent=80.000 minpercent=20.000
HoleToHoleClearance [All] p1: gap=0.4 allowstackedmicrovias=TRUE
MatchedLengths MatchedLengths_DATA [InNetClass('DATA_BUS')] p1: tolerance=5 checknetsindiffpair=TRUE checkdiffpairvsdiffpair=TRUE checkothers=TRUE
MatchedLengths MatchedLengths_ADDR [InNetClass('ADDRESS_BUS')] p2: tolerance=5 checknetsindiffpair=TRUE checkdiffpairvsdiffpair=TRUE checkothers=TRUE
MinimumAnnularRing MinimumAnnularRing_EDBG [WithinRoom('EDBG_Room')] p1: minimumring=0.1
MinimumAnnularRing [All] p2: minimumring=0.15
MinimumSolderMaskSliver [All] p1: minsoldermaskwidth=0.075
NetAntennae [NOT (IsFabTestpoint OR IsAssyTestpoint)] p1: netantennaetolerance=2
PlaneClearance [All] p1: clearance=0.3
PlaneConnect PlaneConnect_50mil [InComponent('J300')] p1: planeconnectstyle=Relief reliefexpansion=0.2 reliefentries=4 reliefconductorwidth=0.2 reliefairgap=0.2
PlaneConnect PlaneConnect_VIA [IsVia OR HasPad('Free-666')] p2: planeconnectstyle=Direct reliefexpansion=0.508 reliefentries=4 reliefconductorwidth=0.254 reliefairgap=0.254
PlaneConnect [All] p3: planeconnectstyle=Relief reliefexpansion=0.508 reliefentries=4 reliefconductorwidth=0.254 reliefairgap=0.254
PolygonConnect PolygonConnect_VIA [IsVia OR HasPad('Free-666')] p1: connectstyle=Direct reliefconductorwidth=0.254 reliefentries=4 polygonreliefangle="90 Angle" airgapwidth=0.254
PolygonConnect [All] p2: connectstyle=Relief reliefconductorwidth=0.2 reliefentries=4 polygonreliefangle="90 Angle" airgapwidth=0.2
RoomDefinition EDBG_Room [InComponentClass('Components Class 1')] p1: confinementstyle=ConfineIn formatcopy=TRUE lockcomponents=FALSE outline -29.475,-12.825 -20.05,-12.825 -20.05,-21.925 -29.475,-21.925
RoutingVias RoutingVias_EDBG [WithinRoom('EDBG_Room')] p1: holewidth=0.25 width=0.55 viastyle="Through Hole" minholewidth=0.2 minwidth=0.4 maxholewidth=0.5 maxwidth=1
RoutingVias [All] p2: holewidth=0.25 width=0.55 viastyle="Through Hole" minholewidth=0.25 minwidth=0.55 maxholewidth=0.5 maxwidth=1
SMDNeckDown [All] p1: percent=90.000
SilkToSilkClearance SilkToSilkClearance_Text [IsText vs IsText] p1: silktosilkclearance=0
SilkToSilkClearance [All] p2: silktosilkclearance=0.1
SilkToSolderMaskClearance SilkscreenOverComponentPads [IsPad] p1: minsilkscreentomaskgap=0.1 clearancetoexposedcopper=TRUE
SolderMaskExpansion SolderMaskTenting [IsVia AND NOT (IsFabTestpoint OR IsAssyTestpoint)] p1: expansion=-1
SolderMaskExpansion [All] p2: expansion=0.05
UnpouredPolygon [All] p1: allowunpoured=FALSE
ViasUnderSMD [All] p1: allowed=FALSE
Width Width_Data_Bus [InNetClass('DATA_BUS')] p1: maxlimit=0.15 minlimit=0.15 preferedwidth=0.15
Width Width_Address_Bus [InNetClass('ADDRESS_BUS')] p2: maxlimit=0.15 minlimit=0.15 preferedwidth=0.15
Width Width_Trace [InNetClass('TRACE')] p3: maxlimit=0.185 minlimit=0.185 preferedwidth=0.185
Width EDBG_Width [WithinRoom('EDBG_Room')] p4: maxlimit=0.254 minlimit=0.125 preferedwidth=0.175
Width [All] p5: maxlimit=10 minlimit=0.15 preferedwidth=0.175
15 further rules are at their usual default settings.

## Classes and differential pairs
net class TRACE: PB05 PB06_SWDIO PB07_SWCLK PD04 PD05 PD06 PD07 PD08
net class ADDRESS_BUS: PA20 PC15 PC20 PC21 PC22 PC23 PC24 PC25 PC26 PC27 PC28 PC29 PD13 PD14 PD17 PD23 PD29
net class DATA_BUS: PA15 PA16 PC00 PC01 PC02 PC03 PC04 PC05 PC06 PC07 PC18 PD15 PE00 PE01 PE02 PE03 PE04 PE05
component class "Power supply": C100 C101 C102 C103 C104 C1103 D100 D101 J100 J101 J102 JS100 L100 Q100 Q101 Q102 Q103 R100 R101 R102 R103 R104 R105 R106 R107 R108 R109 R110 R111 R112 R135 R136 SW100 TP100 U100 U101 U105
component class "Power Multiplexer": C105 C106 Q104 Q105 R113 R114 R115 R116 R117 R118 R119 R120 R121 U102 U103
component class CAN: C1000 C1001 C1002 C1003 J1000 R1000 R1001 U1000
component class "Target MCU": C200 C201 C202 C203 C204 C205 C206 C207 C208 C209 C210 C211 C212 C213 C214 C215 C216 C217 C218 C219 J200 J201 JS200 JS201 L200 L201 L202 R200 R201 R202 R204 R205 R206 R207 R208 R209 R211 R212 R213 R214 R215 R216 R217 R218 R219 R220 R221 R222 R223 R224 R225 R226 R227 R228 R229 R230 R231 R232 R233 R234 TP200 TP201 U200
component class "Shield Connectors": J500 J501 J502 J503 J504 J505 J506 J507
component class SAMV71_Xplained_Ultra_TopLevel: E1 E2 E3 E4 FW1 LABEL1
component class "Power Converter": C107 C108 C109 C110 C111 C112 C113 C114 C115 C116 C117 C118 C119 C120 L101 L102 Q106 Q107 R122 R123 R124 R125 R126 R127 R128 R129 R130 R131 R132 R133 R134 SW101 U104
component class Peripherals: C300 C301 C302 C303 C304 C305 D300 D301 D302 J300 J301 J302 R300 R301 R302 R303 R304 R306 SW300 SW301 TP300 XC300 XC301
component class Memory: C600 C601 C602 C603 C604 C605 C606 C607 C608 C609 C610 C611 C612 C613 J600 R600 R601 R602 R603 R604 R605 R606 R607 R608 R609 R610 R611 R612 TP600 U600 U601 U602 U603 U604
component class Ethernet: C700 C701 C702 C703 C704 C705 C706 C707 C708 C709 C710 C711 C712 C713 J700 L700 L701 L702 R700 R701 R702 R703 R704 R705 R706 R707 R708 R709 R710 R711 R712 R713 R714 R715 R716 R717 R718 R719 R720 U700 XC700
component class EDBG: C900 C901 C902 C903 C904 C905 C906 C907 C908 C909 C910 C911 C912 C913 C914 C915 D900 D901 D902 J900 L900 L901 Q900 R900 R901 R902 R903 R904 R905 R906 R907 R908 R909 R910 R911 R912 R913 R914 R915 R916 R917 R918 R919 R920 R921 TP900 TP901 TP902 TP903 TP904 TP905 TP906 TP907 U900 XC900
component class Connectors: J400 J401 J402 J403 J404 J405 J406 R400 R401 R402 R403
component class Audio: C800 C801 C802 C803 C804 C805 C806 C807 C808 C809 C810 C811 C812 C813 C814 C815 C816 C817 C818 C819 C820 C821 C822 C823 C824 C825 C826 C827 C828 C829 J800 J801 L800 L801 L802 L803 L804 L805 L806 R800 R801 R802 R803 R804 R806 R807 R808 R809 R810 R811 R812 R813 R814 R815 R816 R817 R818 R819 U800 U801 XC800
differential pair TX: +TX_P -TX_N
differential pair RX: +RX_P -RX_N
differential pair EDBG_USB_FS: +EDBG_USB_FS_P -EDBG_USB_FS_N
differential pair EDBG_USB_HS: +EDBG_USB_HS_P -EDBG_USB_HS_N
differential pair TARGET_USB: +TARGET_USB_P -TARGET_USB_N

## Components (designator, comment, footprint, x,y, rotation, side; value= is the part's Value field where it differs from the comment)
C100 "CAP-NONPOL" AP1-00003 -65.2,-20 r90 bottom
C101 "CAP-NONPOL" AP1-00003 -67.6,-16.3 r0 bottom
C102 "CAP-NONPOL" AP1-00001 -72.125,-18.775 r270 bottom
C103 "For reflow soldering" AP1-00122 -62.325,-8.15 r90 top locked
C104 "10n" AP1-00053 -23.6,-10.675 r180 top locked
C105 "CAP-NONPOL" AP1-00001 -21.2,-4.65 r180 bottom locked
C106 "CAP-NONPOL" AP1-00001 -20.65,-10.675 r180 bottom
C107 "CAP-NONPOL" AP1-00039 -52.275,-16.225 r0 bottom
C108 "Farnell no: 1288200" AP1-00053 -60.55,-13.15 r270 bottom
C109 "Farnell no: 1288200" AP1-00053 -52.275,-10.425 r0 bottom
C110 "Farnell no: 1288200" AP1-00053 -52.275,-11.344 r0 bottom
C111 "Farnell no: 1288200" AP1-00053 -52.275,-15.1 r0 bottom
C112 "The MPN for this component is X5R, not X7R as previously documented." AP1-00041 -58.15,-17.425 r0 bottom locked
C113 "The MPN for this component is X5R, not X7R as previously documented." AP1-00041 -58.175,-8.925 r0 bottom locked
C114 "CAP-NONPOL" AP1-00053 -53.575,-22.425 r90 bottom
C115 "The MPN for this component is X5R, not X7R as previously documented." AP1-00041 -57.6,-20.225 r0 bottom locked
C116 "CAP-NONPOL" AP1-00053 -54.4,-4.025 r270 bottom
C117 "The MPN for this component is X5R, not X7R as previously documented." AP1-00041 -57.6,-6.175 r0 bottom locked
C118 "CAP-NONPOL" AP1-00053 -54.4,-6.475 r270 bottom
C119 "CAP-NONPOL" AP1-00053 -52.275,-12.763 r0 bottom
C120 "CAP-NONPOL" AP1-00053 -52.275,-13.681 r0 bottom
C200 "CAP-NONPOL" AP1-00001 -58.8,-43.3 r180 top
C201 "CAP-NONPOL" AP1-00001 -58.8,-55.75 r180 top
C202 "CAP-NONPOL" AP1-00001 -50.75,-63.8 r270 top
C203 "CAP-NONPOL" AP1-00001 -36.25,-63.8 r270 top
C204 "CAP-NONPOL" AP1-00001 -31.2,-55.25 r0 top
C205 "CAP-NONPOL" AP1-00001 -31.2,-47.25 r0 top
C206 "CAP-NONPOL" AP1-00001 -48.25,-36.9 r0 top
C207 "CAP-NONPOL" AP1-00001 -56.05,-38.25 r180 top
C208 "CAP-NONPOL" AP1-00001 -58.8,-42.2 r180 top
C209 "CAP-NONPOL" AP1-00001 -58.8,-54.65 r180 top
C210 "CAP-NONPOL" AP1-00001 -58.8,-57.25 r180 top
C211 "CAP-NONPOL" AP1-00001 -47.25,-63.8 r270 top
C212 "CAP-NONPOL" AP1-00001 -31.2,-54.15 r0 top
C213 "CAP-NONPOL" AP1-00001 -31.2,-41.75 r0 top
C214 "CAP-NONPOL" AP1-00001 -43.825,-36.9 r180 top
C215 "ESR = 6 ohm" AP1-00036 -60.65,-40.125 r180 top
C216 "CAP-NONPOL" AP1-00041 -31.725,-45.725 r0 top locked
C217 "CAP-NONPOL" AP1-00001 -51.3,-36.2 r90 top
C218 "CAP-NONPOL" AP1-00001 -58.8,-45.25 r180 top
C219 "10p" AP1-00053 -52.45,-36.5 r90 top
C300 "CAP-NONPOL" AP1-00001 -59.275,-59.075 r180 top
C301 "CAP-NONPOL" AP1-00001 -62.225,-59.075 r180 top
C302 "CAP-NONPOL" AP1-00001 -53.275,-32.925 r90 top
C303 "CAP-NONPOL" AP1-00001 -59.35,-35.75 r180 top
C304 "CAP-NONPOL" AP1-00053 -51.2,-6.978 r90 top locked
C600 "CAP-NONPOL" AP1-00001 -38.025,-86.925 r180 top
C601 "CAP-NONPOL" AP1-00001 -38.025,-82.475 r180 top
C602 "CAP-NONPOL" AP1-00001 -36.225,-76.825 r270 top
C603 "Farnell no: 1288200" AP1-00053 -57.272,-81.3 r270 bottom
C604 "CAP-NONPOL" AP1-00053 -56.422,-81.3 r270 bottom
C605 "CAP-NONPOL" AP1-00053 -55.547,-79.9 r270 bottom
C606 "CAP-NONPOL" AP1-00053 -52.297,-79.25 r270 bottom
C607 "CAP-NONPOL" AP1-00053 -52.297,-77.3 r270 bottom
C608 "CAP-NONPOL" AP1-00053 -55.547,-77.95 r270 bottom
C609 "CAP-NONPOL" AP1-00053 -55.547,-76 r270 bottom
C610 "CAP-NONPOL" AP1-00053 -55.547,-70.5 r90 bottom
C611 "CAP-NONPOL" AP1-00001 -25.325,-68.1 r90 top
C612 "The MPN for this component is X5R, not X7R as previously documented." AP1-00041 -47.823,-104.55 r270 top locked
C613 "CAP-NONPOL" AP1-00001 -46.248,-105.15 r270 top
C700 "CAP-NONPOL" AP1-00001 -10.25,-100.2 r270 top
C701 "CAP-NONPOL" AP1-00003 -9.05,-102.55 r180 top
C702 "CAP-NONPOL" AP1-00001 -4.4,-94.625 r0 top
C703 "CAP-NONPOL" AP1-00003 -5.9,-103.325 r90 top
C704 "CAP-NONPOL" AP1-00001 -11.525,-100.45 r90 top
C705 "CAP-NONPOL" AP1-00001 -4.075,-113.575 r270 top
C706 "CAP-NONPOL" AP1-00001 -4.075,-116.1 r90 top
C707 "CAP-NONPOL" AP1-00001 -5.1,-99.675 r270 top
C708 "CAP-NONPOL" AP1-00041 -3.525,-99.15 r270 top locked
C709 "CAP-NONPOL" AP1-00001 -15.65,-98.65 r0 top
C710 "CAP-NONPOL" AP1-00001 -4.4,-97.825 r0 top
C711 "CAP-NONPOL" AP1-00001 -13.95,-96.125 r180 top
C712 "CAP-NONPOL" AP1-00041 -13.15,-93.275 r180 top locked
C713 "CAP-NONPOL" AP1-00001 -15.75,-96.575 r270 top
C800 "CAP-NONPOL" AP1-00001 -69.975,-107.875 r180 top
C801 "CAP-NONPOL" AP1-00001 -79.4,-116.15 r0 top
C802 "CAP-NONPOL" AP1-00001 -85.4,-116.15 r180 top
C803 "8819904  @ element14" AP1-00001 -79.4,-117.35 r0 top
C804 "8819904  @ element14" AP1-00001 -85.4,-117.35 r180 top
C805 "CAP-NONPOL" AP1-00038 -70.333,-114.376 r90 top
C806 "CAP-NONPOL" AP1-00001 -81.05,-109.275 r180 top
C807 "CAP-NONPOL" AP1-00001 -81.05,-110.375 r180 top
C808 "CAP-NONPOL" AP1-00039 -75.4,-112.7 r270 top
C809 "CAP-NONPOL" AP1-00038 -66.802,-114.376 r90 top
C810 "Farnell no: 1288200" AP1-00001 -80.3,-105.6 r0 top
C811 "CAP-NONPOL" AP1-00039 -76.6,-112.7 r270 top
C812 "CAP-NONPOL" AP1-00001 -71.55,-117.5 r180 top
C813 "CAP-NONPOL" AP1-00001 -65.575,-117.5 r0 top
C814 "Recommended by Escatec. No datasheet available yet." AP1-00001 -80.3,-107.8 r180 top
C815 "Recommended by Escatec. No datasheet available yet." AP1-00001 -80.3,-106.7 r180 top
C816 "CAP-NONPOL" AP1-00001 -78.875,-112.75 r180 top
C817 "CAP-NONPOL" AP1-00039 -78.975,-111.55 r180 top
C818 "CAP-NONPOL" AP1-00001 -75.25,-103.283 r90 top
C819 "CAP-NONPOL" AP1-00039 -74.025,-103.183 r90 top
C820 "Farnell no: 1288200" AP1-00001 -73.5,-111.975 r0 top
C821 "CAP-NONPOL" AP1-00001 -73.5,-110.875 r0 top
C822 "CAP-NONPOL" AP1-00001 -55.65,-85.35 r180 top
C823 "CAP-NONPOL" AP1-00001 -58.975,-93.425 r270 top
C824 "CAP-NONPOL" AP1-00001 -61.375,-85.625 r0 top
C825 "CAP-NONPOL" AP1-00039 -81.175,-103.675 r90 top
C826 "CAP-NONPOL" AP1-00001 -79.975,-103.775 r90 top
C827 "CAP-NONPOL" AP1-00001 -78.85,-103.775 r90 top
C828 "CAP-NONPOL" AP1-00039 -77.05,-101.075 r180 top
C829 "CAP-NONPOL" AP1-00001 -77.75,-103.275 r90 top
C900 "22p" AP1-00053 -16.9,-21.7 r90 bottom locked
C901 "22p" AP1-00053 -16.9,-19.8 r270 bottom locked
C902 "10p" AP1-00053 -17.475,-16.425 r0 bottom locked
C903 "CAP-NONPOL" AP1-00053 -18.1,-6.9 r90 top locked
C904 "100n" AP1-00053 -31.55,-15.6 r180 bottom locked
C905 "Farnell no: 1288200" AP1-00053 -25.375,-11.8 r180 bottom locked
C906 "1 nF C0G" AP1-00053 -25.375,-12.7 r180 bottom locked
C907 "1 nF C0G" AP1-00053 -12.6,-9.1 r270 top locked
C908 "1 nF C0G" AP1-00053 -11.3,-9.1 r270 top locked
C909 "Farnell no: 1288200" AP1-00053 -23.275,-11.8 r0 bottom locked
C910 "100n" AP1-00053 -23.275,-12.7 r0 bottom locked
C911 "100n" AP1-00053 -19.675,-18 r0 bottom locked
C912 "100n" AP1-00053 -25.25,-22.2 r0 bottom locked
C913 "100n" AP1-00053 -29.875,-18.6 r270 bottom locked
C914 "Farnell no: 1288200" AP1-00053 -30.75,-18.6 r270 bottom locked
C915 "Farnell no: 1288200" AP1-00053 -25.25,-22.95 r0 bottom
C1000 "CAP-NONPOL" AP1-00003 -53.95,-122.455 r0 top
C1001 "CAP-NONPOL" AP1-00001 -56.4,-116.58 r180 top
C1002 "CAP-NONPOL" AP1-00001 -53.925,-116.58 r0 top
C1003 "CAP-NONPOL" AP1-00001 -56.25,-119.83 r90 top
D100 "DUAL_SCHOTTKY_123" AP5-00002 -63.025,-13.05 r180 bottom
D101 "SCHOTTKY_SMD_31" AP4-00007 -65.75,-4.475 r0 bottom
D300 "Yellow" AP4-00013 -86.005,-28.35 r180 top
D301 "Yellow" AP4-00013 -33.1,-12 r180 top locked
D302 "PRTR5V0U2X" AP4-00001 -49.159,-7.178 r0 top locked
D900 "Green" AP4-00013 -8.75,-2.5 r90 top locked
D901 "Yellow" AP4-00013 -6.5,-2.5 r90 top locked
D902 "PRTR5V0U2X" AP4-00001 -16.325,-7.178 r0 top locked
E1 "RUBBER FEET" AP8-00192 -9,-4.5 r180 bottom locked
E2 "RUBBER FEET" AP8-00192 -81,-4.5 r180 bottom locked
E3 "RUBBER FEET" AP8-00192 -9,-130.5 r180 bottom locked
E4 "RUBBER FEET" AP8-00192 -81,-130.5 r180 bottom
J100 "DC_JACK" AP8-00853 -74.45,-7.7 r270 top locked
J101 "HEADER 2x2" AP8-00628 -5.7,-14.76 r270 top locked
J102 "HEADER 1x2" AP8-00367 -40,-10.95 r0 top locked
J200 "HEADER 1x2" AP8-00733 -27.442,-53.025 r90 top locked
J201 "HEADER 1x2" AP8-00733 -61.55,-44.23 r90 top
J300 "" AP9-00044 -58.75,-61.225 r90 top net-tie
J301 "" AP9-00044 -54.575,-32.575 r270 top net-tie
J302 "2,000 pieces per reel" AP8-00852 -48.434,-1.675 r180 top locked
J400 "HEADER 2x15" AP8-00884 -76.185,-37.874 r90 top locked
J401 "HEADER 2x10" AP8-00622 -5.7,-40.16 r270 top locked
J402 "HEADER 2x10" AP8-00622 -5.7,-75.72 r270 top locked
J403 "FTSH-110-01-F-DV-007-K" AP8-00910 -40.325,-19.875 r270 top
J404 "Used for Xplained Pro MCU board on top layer." AP8-00774 -88.15,-79.35 r270 top locked
J405 "For SMSC MediaLB,  / Mates with QTH-020-01-X-D-DP-XXX" AP8-00878 -78,-83.95 r0 top locked
J406 "Same as A08-1514 but with 1mm hole" AP8-00744 -85.71,-44.224 r90 top locked
J500 "HEADER 1x10 FEMALE" AP8-00822 -19.67,-35.08 r90 top locked
J501 "HEADER 1x8 FEMALE" AP8-00823 -67.93,-41.684 r270 top locked
J502 "HEADER 1x8 FEMALE" AP8-00823 -67.93,-64.544 r270 top locked
J503 "HEADER 1x8 FEMALE" AP8-00823 -19.67,-59.464 r90 top locked
J504 "HEADER 1x8 FEMALE" AP8-00823 -67.93,-87.404 r270 top locked
J505 "HEADER 1x8 FEMALE" AP8-00823 -19.67,-82.324 r90 top locked
J506 "HEADER 2x3" AP8-00182 -42.53,-69.751 r180 top locked
J507 "HEADER 2x18 FEMALE" AP8-00259 -41.26,-100.104 r180 top locked
J600 "SD/MMC Card socket" AP8-00377 -45.053,-115.2 r0 bottom
J700 "RJ45" AP8-00749 -16.075,-121.125 r180 top locked
J800 "Farnell No:1216980" AP8-00397 -80.425,-127.075 r180 top locked
J801 "Farnell No:1216980" AP8-00397 -67.925,-127.025 r180 top locked
J900 "2,000 pieces per reel" AP8-00852 -15.6,-1.675 r180 top locked
J1000 "HEADER 1x2" AP8-00733 -60.35,-131.675 r90 top locked
JS100 "To be used by request from ESCATEC" AP8-00525 -40.1,-5.3 r0 top locked
JS200 "To be used by request from ESCATEC" AP8-00525 -28.675,-51.696 r180 top
JS201 "To be used by request from ESCATEC" AP8-00525 -61.55,-44.23 r90 top
L100 "INDUCTOR" AP3-00119 -67.5,-24.125 r0 bottom
L101 "INDUCTOR" AP3-00119 -60.425,-20.575 r270 bottom
L102 "INDUCTOR" AP3-00119 -60.425,-5.85 r90 bottom
L200 "INDUCTOR" AP3-00005 -58.775,-46.4 r0 top
L201 "INDUCTOR" AP3-00005 -43.175,-34.95 r270 top
L202 "INDUCTOR" AP3-00005 -51.3,-33.126 r270 top
L700 "INDUCTOR" AP3-00005 -8.875,-104.225 r0 top
L701 "INDUCTOR" AP3-00005 -1.925,-98.475 r270 top
L702 "INDUCTOR" AP3-00005 -3.325,-118.075 r180 top
L800 "INDUCTOR" AP3-00028 -83.075,-116.75 r270 top
L801 "INDUCTOR" AP3-00028 -81.725,-116.75 r270 top
L802 "INDUCTOR" AP3-00028 -69.225,-116.8 r90 top
L803 "INDUCTOR" AP3-00028 -67.9,-116.8 r90 top
L804 "INDUCTOR" AP3-00104 -79.05,-114.3 r0 top locked
L805 "INDUCTOR" AP3-00104 -72.975,-113.525 r180 top locked
L806 "INDUCTOR" AP3-00104 -83.325,-103.25 r270 top locked
L900 "BLM18PG471SN1" AP3-00005 -11.9,-7.5 r0 top locked
L901 "BLM18PG471SN1" AP3-00005 -31.95,-16.7 r0 bottom locked
LABEL1 "Only use for Early kits that contains \"ES\" version IC" AP8-00317 -6.612,-125.396 r90 bottom
Q100 "MOSFET_P_GSD" AP5-00002 -74.45,-16.975 r270 bottom
Q101 "MOSFET_P_GSD" AP5-00002 -69.8,-7.2 r0 bottom
Q102 "MOSFET_P_GSD" AP5-00002 -64.525,-8.287 r180 bottom
Q103 "MOSFET_P_GSD" AP5-00002 -10.4,-12.4 r0 bottom locked
Q104 "MOSFET_P_GSD" AP5-00002 -14.5,-11.45 r0 bottom locked
Q105 "MOSFET_N_GSD" AP5-00002 -14.5,-15 r180 bottom locked
Q106 "MOSFET_P_GSD" AP5-00002 -85.825,-10.55 r270 bottom
Q107 "MOSFET_N_GSD" AP5-00002 -85.825,-14.425 r270 bottom
Q900 "Same as 2N7002 but with two MOSFETs in one package" AP5-00001 -3.725,-8.8 r270 bottom
R100 "R2" AP2-00000 -59.075,-2.65 r90 bottom
R101 "R2" AP2-00000 -71.3,-23.675 r90 bottom
R102 "R2" AP2-00000 -36.6,-11.55 r90 bottom
R103 "R2" AP2-00000 -35.325,-11.55 r270 bottom
R104 "R2" AP2-00000 -65.3,-10.725 r0 bottom
R105 "R2" AP2-00000 -67.15,-7.75 r90 bottom
R106 "R2" AP2-00011 -21.475,-9.8 r0 top locked
R107 "R2" AP2-00011 -21.475,-10.675 r180 top
R108 "R2" AP2-00000 -66.35,-1.775 r180 bottom
R109 "R2" AP2-00000 -68.375,-3.575 r270 bottom
R110 "R2" AP2-00011 -23.6,-9.8 r0 top locked
R111 "R2" AP2-00000 -67.15,-10.3 r90 bottom
R112 "R2" AP2-00000 -70.65,-4.675 r0 bottom
R113 "R2" AP2-00000 -21.2,-3.525 r180 bottom locked
R114 "R2" AP2-00000 -17.1,-11.1 r90 bottom
R115 "R2" AP2-00000 -9.875,-14.85 r0 bottom
R116 "R2" AP2-00000 -13.675,-7.175 r90 bottom
R117 "R2" AP2-00000 -20.65,-9.5 r0 bottom
R118 "R2" AP2-00000 -13.8,-9.075 r180 bottom
R119 "R2" AP2-00000 -11.8,-15.5 r90 bottom locked
R120 "R2" AP2-00011 -28.95,-6.575 r270 bottom
R121 "R2" AP2-00011 -28.95,-4.575 r270 bottom
R122 "R2" AP2-00011 -54.4,-22.45 r270 bottom
R123 "R2" AP2-00011 -54.4,-20.025 r270 bottom
R124 "R2" AP2-00011 -53.525,-4.025 r90 bottom
R125 "R2" AP2-00011 -86.325,-16.95 r0 bottom
R126 "R2" AP2-00011 -53.525,-6.475 r270 bottom
R127 "R2" AP2-00011 -85.825,-8.025 r0 bottom
R128 "R2" AP2-00011 -49.775,-12.213 r270 bottom
R129 "R2" AP2-00011 -88.175,-15.125 r270 bottom
R130 "R2" AP2-00011 -50.675,-12.213 r90 bottom
R131 "R2" AP2-00011 -88.175,-12.5 r270 bottom
R132 "R2" AP2-00011 -49.775,-14.231 r90 bottom
R133 "R2" AP2-00011 -50.675,-14.231 r270 bottom
R134 "R2" AP2-00011 -53.825,-18.1 r0 bottom
R135 "R2" AP2-00000 -66.325,-12.3 r180 bottom
R136 "?" AP2-00000 -66.325,-13.475 r0 bottom
R200 "R2" AP2-00000 -66.725,-104 r180 top
R201 "R2" AP2-00000 -11.45,-43.975 r0 top
R202 "R2" AP2-00000 -11.45,-45.125 r0 top
R204 "R2" AP2-00000 -38.328,-64.949 r270 bottom
R205 "R2" AP2-00000 -42.878,-64.949 r270 bottom
R206 "R2" AP2-00000 -41.728,-64.949 r90 bottom
R207 "R2" AP2-00000 -22.5,-73.419 r0 top
R208 "R2" AP2-00000 -22.5,-75.969 r0 top
R209 "R2" AP2-00000 -11.45,-73.175 r0 top
R211 "R2" AP2-00000 -23.475,-95.875 r270 top
R212 "R2" AP2-00000 -39.478,-64.949 r270 bottom
R213 "R2" AP2-00000 -26.025,-95.869 r270 top
R214 "R2" AP2-00000 -44.028,-64.949 r90 bottom
R215 "R2" AP2-00000 -65.075,-55.644 r180 top
R216 "R2" AP2-00000 -65.075,-68.369 r180 top
R217 "R2" AP2-00000 -65.075,-70.894 r180 top
R218 "R2" AP2-00000 -65.075,-73.444 r180 top
R219 "R2" AP2-00000 -65.075,-78.519 r180 top
R220 "R2" AP2-00000 -65.075,-81.069 r180 top
R221 "R2" AP2-00000 -65.075,-83.594 r180 top
R222 "R2" AP2-00000 -65.075,-86.119 r180 top
R223 "R2" AP2-00000 -66.725,-107.45 r180 top
R224 "R2" AP2-00000 -66.725,-109.75 r180 top
R225 "R2" AP2-00000 -59.4,-83.675 r0 top
R226 "R2" AP2-00000 -66.725,-108.6 r180 top
R227 "R2" AP2-00000 -40.6,-64.95 r270 bottom
R228 "R2" AP2-00000 -66.725,-106.3 r180 top
R229 "R2" AP2-00000 -66.725,-105.15 r180 top
R230 "R2" AP2-00000 -54.1,-88.075 r270 top
R231 "R2" AP2-00000 -49.075,-89.5 r180 top
R232 "R2" AP2-00000 -49.075,-90.65 r180 top
R233 "R2" AP2-00000 -53.128,-34.968 r180 top
R234 "R2" AP2-00000 -22.5,-78.525 r0 top
R300 "R2" AP2-00011 -30.65,-9.85 r0 top locked
R301 "R2" AP2-00011 -82.05,-24.925 r270 top
R302 "R2" AP2-00000 -85.85,-29.969 r0 top
R303 "R2" AP2-00000 -35.675,-11.95 r90 top
R304 "R2" AP2-00011 -52.1,-6.978 r90 top locked
R400 "R2" AP2-00000 -77.45,-48.034 r0 bottom
R401 "R2" AP2-00000 -77.45,-45.494 r0 bottom
R402 "R2" AP2-00000 -81.759,-35.56 r0 bottom
R403 "R2" AP2-00000 -78.777,-40.421 r0 bottom
R600 "R2" AP2-00000 -42.9,-89.675 r180 top
R601 "R2" AP2-00000 -42.9,-88.525 r180 top
R602 "R2" AP2-00000 -42.9,-87.375 r180 top
R603 "R2" AP2-00000 -35.525,-88.425 r180 top
R604 "R2" AP2-00000 -57.997,-73 r270 top
R605 "R2" AP2-00000 -25.325,-63.7 r90 top
R606 "R2" AP2-00000 -41.253,-105.15 r270 top
R607 "R2" AP2-00000 -38.753,-105.15 r270 top
R608 "R2" AP2-00000 -36.253,-105.15 r270 top
R609 "R2" AP2-00000 -55.378,-105.15 r270 top
R610 "R2" AP2-00000 -53.678,-105.15 r270 top
R611 "R2" AP2-00000 -57.378,-105.15 r270 top
R612 "R2" AP2-00000 -59.7,-126.7 r270 top
R700 "R2" AP2-00000 -28.469,-91.048 r180 top
R701 "R2" AP2-00000 -8.85,-105.775 r0 top
R702 "R2" AP2-00000 -16.875,-96.575 r270 top
R703 "R2" AP2-00000 -23.3,-105.8 r0 top
R704 "R2" AP2-00000 -13.95,-97.25 r0 top
R705 "R2" AP2-00000 -28.469,-84.173 r180 top
R706 "R2" AP2-00000 -28.469,-87.623 r180 top
R707 "R2" AP2-00000 -28.469,-86.473 r180 top
R708 "R2" AP2-00000 -28.469,-83.023 r180 top
R709 "R2" AP2-00000 -28.469,-81.873 r180 top
R710 "R2" AP2-00000 -28.469,-89.923 r180 top
R711 "R2" AP2-00000 -28.469,-85.323 r180 top
R712 "R2" AP2-00000 -13.45,-94.825 r180 top
R713 "R2" AP2-00000 -28.469,-88.773 r180 top
R714 "R2" AP2-00000 -25.194,-86.473 r0 top
R715 "R2" AP2-00000 -25.194,-83.023 r0 top
R716 "R2" AP2-00000 -25.194,-81.873 r0 top
R717 "R2" AP2-00000 -25.194,-89.923 r0 top
R718 "R2" AP2-00000 -25.194,-88.773 r180 top
R719 "R2" AP2-00000 -25.188,-84.173 r0 top
R720 "R2" AP2-00000 -25.194,-87.623 r0 top
R800 "R2" AP2-00000 -83.075,-114.25 r270 top
R801 "R2" AP2-00000 -72.5,-107.875 r180 top
R802 "R2" AP2-00000 -81.725,-114.25 r270 top
R803 "R2" AP2-00000 -69.225,-114.3 r90 top
R804 "R2" AP2-00000 -67.9,-114.3 r90 top
R806 "R2" AP2-00000 -70.3,-111.6 r90 top
R807 "R2" AP2-00000 -77.075,-116.75 r90 top
R808 "R2" AP2-00000 -87.725,-116.75 r90 top
R809 "R2" AP2-00000 -84.05,-109.25 r0 top
R810 "R2" AP2-00000 -84.05,-110.4 r0 top
R811 "R2" AP2-00000 -67.475,-112.025 r180 top
R812 "R2" AP2-00000 -71.55,-116.125 r0 top
R813 "R2" AP2-00000 -65.575,-116.125 r180 top
R814 "R2" AP2-00000 -84.475,-106.4 r0 top
R815 "R2" AP2-00000 -74.2,-117.225 r90 top
R816 "R2" AP2-00000 -71,-102.025 r180 top
R817 "R2" AP2-00000 -58.15,-85.325 r180 top
R818 "R2" AP2-00000 -56.5,-93.425 r90 top
R819 "R2" AP2-00000 -76.625,-103.275 r270 top
R900 "R2" AP2-00000 -35.131,-28.169 r270 bottom
R901 "R2" AP2-00000 -10.725,-26.5 r0 bottom locked
R902 "R2" AP2-00000 -6.4,-25.2 r0 bottom locked
R903 "R2" AP2-00000 -6.4,-26.5 r0 bottom locked
R904 "R2" AP2-00000 -28.956,-28.162 r270 bottom
R905 "R2" AP2-00000 -27.631,-28.162 r270 bottom
R906 "R2" AP2-00000 -5.7,-9.2 r270 bottom locked
R907 "R2" AP2-00000 -4.9,-11.1 r180 bottom
R908 "R2" AP2-00000 -1.8,-9.2 r90 bottom
R909 "R2" AP2-00000 -2.4,-11.1 r180 bottom
R910 "R2" AP2-00000 -31.881,-28.169 r90 bottom
R911 "R2" AP2-00000 -26.016,-28.162 r90 bottom
R912 "R2" AP2-00000 -24.741,-28.162 r90 bottom
R913 "R2" AP2-00000 -23.466,-28.162 r90 bottom
R914 "R2" AP2-00000 -22.191,-28.162 r90 bottom
R915 "R2" AP2-00000 -33.481,-28.169 r270 bottom
R916 "R2" AP2-00011 -20.175,-13.4 r90 bottom locked
R917 "R2" AP2-00011 -20.175,-15.4 r270 bottom locked
R918 "R2" AP2-00011 -17.475,-15.525 r180 bottom locked
R919 "R2" AP2-00011 -19,-6.9 r90 top locked
R920 "R2" AP2-00000 -57.7,-2.65 r270 bottom
R921 "R2" AP2-00000 -30.281,-28.162 r270 bottom
R1000 "0.5W" AP2-00008 -52.305,-125.85 r270 top
R1001 "0.5W" AP2-00008 -55.605,-125.85 r90 top
SW100 "Can be ordered in low volumes from Mouser" AP8-00137 -26,-4.9 r90 top locked
SW101 "Can be ordered in low volumes from Mouser" AP8-00137 -85.85,-11.075 r90 top
SW300 "Can be ordered in low volumes from Mouser" AP8-00137 -33,-4.9 r90 top locked
SW301 "Can be ordered in low volumes from Mouser" AP8-00137 -85.85,-21.7 r90 top
TP100 "TESTPOINT" AP8-00010 -26,-1.5 r270 bottom locked
TP200 "TESTPOINT" AP8-00010 -31.825,-52.75 r90 bottom locked
TP201 "TESTPOINT" AP8-00010 -31.95,-43.25 r90 bottom locked
TP300 "TESTPOINT" AP8-00010 -33,-1.5 r270 bottom locked
TP600 "TESTPOINT" AP8-00010 -62.5,-126.1 r90 bottom locked
TP900 "TESTPOINT" AP8-00010 -41.6,-1.5 r270 bottom locked
TP901 "TESTPOINT" AP8-00010 -38.6,-1.5 r270 bottom locked
TP902 "TESTPOINT" AP8-00010 -41.6,-3.5 r270 bottom locked
TP903 "TESTPOINT" AP8-00010 -41.6,-5.5 r270 bottom locked
TP904 "TESTPOINT" AP8-00010 -38.6,-5.5 r270 bottom locked
TP905 "TESTPOINT" AP8-00010 -41.6,-7.5 r270 bottom locked
TP906 "TESTPOINT" AP8-00010 -38.6,-3.5 r270 bottom locked
TP907 "TESTPOINT" AP8-00010 -38.6,-7.5 r270 bottom locked
U100 "100% duty-cycle mode, supports input voltage close to 5V with 5V output!" AP6-00313 -69.425,-19.675 r90 bottom locked
U101 "TPS3619-33" AP6-00382 -72.375,-2.4 r90 bottom locked
U102 "TPS2112" AP6-00054 -18.475,-7.125 r180 bottom locked
U103 "STMPS2161" AP6-00087 -26.725,-5.65 r90 bottom
U104 "Auto-mode, no sync." AP6-00380 -56.3,-13.2 r90 bottom
U105 "" AP6-00087 -69.92,-11.125 r270 bottom
U200 "Engineering Sample 2" AP6-00118 -45,-50 r0 top locked
U600 "AT24MAC-8PIN" AP6-00186 -38.975,-88.775 r0 top
U601 "FBGA60" AP6-00400 -53.922,-75.525 r180 top locked
U602 "SOIC-8 / UDFN8 2x3mm (8MA2) footprint used for this component, usually for \"not mounted\" in schematics to support several Crypto devices." AP6-00409 -38.775,-84.125 r0 top
U603 "SOIC-8 / UDFN8 2x3mm (8MA2) footprint used for this component, usually for \"not mounted\" in schematics to support several Crypto devices." AP6-00071 -40.525,-78.125 r0 top
U604 "Also available as 32- and 64-Mbit." AP6-00402 -28.65,-65.8 r270 top
U700 "KSZ8061RNB" AP6-00349 -8.675,-95.875 r90 top
U800 "Wolfson Microelectronics" AP6-00420 -76.4,-107.675 r270 top
U801 "CS2100" AP6-00097 -56.55,-89.1 r270 top
U900 "100 ball VFBGA" AP6-00206 -24.9,-17.475 r90 bottom locked
U1000 "ATA6561" AP6-00407 -53.95,-119.08 r270 top locked
XC300 "Farnell order no:1539364" AP7-00044 -61.475,-60.625 r180 top
XC301 "CRYSTAL1324" AP7-00039 -58.275,-33.075 r0 top
XC700 "CRYSTAL1324" AP7-00067 -14.376,-102.464 r90 top locked
XC800 "CRYSTAL1324" AP7-00039 -60.525,-89.2 r270 top locked
XC900 "12.0MHz" AP7-00039 -14.25,-20.25 r90 bottom locked

## Footprints (in the part's own frame and the unit in brackets; to place one, negate y for a bottom-side part, rotate by r counter-clockwise, add the part's x,y. Pads: shape width x height; smd on the part's side, far side on the other; paste and mask are expansions set on the pad)
AP1-00001 [mm] "Standard 0402 SMD capacitor footprint"
  rect 0.9x0.6 smd: 1(-0.55,0) 2(0.55,0)
  silkscreen extent -1.25,-0.55 1.25,0.55, body extent -0.5,-0.3 0.5,0.3, height 0.2
AP1-00003 [mm]
  rect 1.35x1.5 smd: 1(-0.825,0) 2(0.825,0)
  silkscreen extent -1.78,-1 1.78,1, body extent -1,-0.63 1,0.63, height 0.78
AP1-00036 [mm] "SMD capacitors: 3216-18 EIA Case 1206, polarized"
  rect 0.95x1.75 smd: 1(-1.475,0) 2(1.475,0)
  silkscreen extent -2.95,-1.12 2.2,1.12, body extent -1.6,-0.8 1.6,0.8, height 1
AP1-00038 [mm] "Generic pad 0402, spacing 0.45mm"
  rect 0.6x0.5 smd: 1(-0.525,0) 2(0.525,0)
  silkscreen extent -1.05,-0.48 1.05,0.47, body extent -0.5,-0.3 0.5,0.3, height 0.2
AP1-00039 [mil] "Capacitor 0603 Hight 0.8mm"
  rect 30x30 smd: 1(-27.5,0) 2(27.5,0)
  silkscreen extent -52,-24 51,24, body extent -31,-16 32,16, height 12
AP1-00041 [mil]
  rect 43x63 smd: 1(0,0) 2(80,0)
  silkscreen extent -30,-39 109,39, body extent 1,-25 79,25, height 31
AP1-00053 [mm] "Chip Capacitor, 2-Leads, Body 1.0x0.5mm, IPC High Density"
  rect 0.65x0.5 smd: 1(-0.475,0) 2(0.475,0)
  body extent -0.5,-0.3 0.5,0.3, height 0.2
AP1-00122 [mm]
  rect 4.6x2.5 smd: 1(-4.8,0) 2(4.8,0)
  silkscreen extent -6,-6 6,6, body extent -5.4,-5.4 5.4,5.4, height 6.9
AP2-00000 [mm] "Standard 0402 SMD resistor footprint"
  rect 0.8x0.65 smd: 1(-0.6,0) 2(0.6,0)
  silkscreen extent -1.25,-0.58 1.25,0.58, body extent -0.5,-0.3 0.5,0.3, height 0.2
AP2-00008 [mm]
  rect 1.4x2.8 smd: 1(-1.45,0) 2(1.45,0)
  silkscreen extent -2.4,-1.65 2.4,1.65, body extent -1.6,-1.25 1.6,1.25, height 0.55
AP2-00011 [mm] "Chip Resistor, 2-Leads, Body 1,0x0,5mm, IPC High Density"
  rect 0.6x0.55 smd: 1(-0.5,0) 2(0.5,0)
  body extent -0.5,-0.3 0.5,0.3, height 0.2
AP3-00005 [mm]
  rect 0.7x0.7 smd: 1(-0.7,0) 2(0.7,0)
  silkscreen extent -1.3,-0.6 1.3,0.6, body extent -0.83,-0.41 0.82,0.41, height 0.8
AP3-00028 [mm] "0402 SMD EMI inductor footprint, Murata"
  rect 0.8x0.65 smd: 1(-0.6,0) 2(0.6,0)
  silkscreen extent -1.25,-0.58 1.25,0.58, body extent -0.58,-0.3 0.58,0.3, height 0.41
AP3-00104 [mil] "0805 with EMIFIL chip 3D model, hight 0.85mm"
  rect 43x63 smd: 1(-40,0) 2(40,0)
  silkscreen extent -70,-39 69,39, body extent -39,-24 39,24, height 37
AP3-00119 [mm]
  rect 0.98x3.7 smd paste-0.125: 1(-1.185,0) 2(1.185,0)
  body extent -2.15,-2.15 2.15,2.15, height 2.1
AP4-00001 [mm]
  rect 1.1x1 smd: 1(0,0)
  rect 1.1x0.6 smd: 2(0,-1.7) 3(2.1,-1.7) 4(2.1,0.2)
  silkscreen extent -0.82,-2.5 2.93,1, body extent -0.13,-2.2 2.23,0.7, height 1.21
AP4-00007 [mm]
  rect 1.4x0.6 smd: 1(-0.95,0.95) 2(-0.95,-0.95) 3(0.95,0)
  silkscreen extent -1.88,-1.75 1.88,1.75, body extent -1.25,-1.5 1.25,1.5, height 1.07
AP4-00013 [mm] "0805 diode footprint"
  rect 1.2x1.2 smd: 1(-1.05,0) 2(1.05,0)
  silkscreen extent -2.16,-1 1.85,1, body extent -1,-0.63 1,0.63, height 1.1
AP5-00001 [mm]
  rect 0.85x0.35 smd: 1(-0.925,0.65) 2(-0.925,0) 3(-0.925,-0.65) 4(0.925,-0.65) 5(0.925,0) 6(0.925,0.65)
  silkscreen extent -1.6,-1.35 1.6,1.35, body extent -1.05,-1 1.05,1, height 0.95
AP5-00002 [mm] "SOT-23 Package"
  rect 1.3x0.6 smd: 1(-1.05,0.95) 2(-1.05,-0.95) 3(1.05,0)
  silkscreen extent -1.95,-1.78 1.95,1.78, body extent -1.25,-1.46 1.23,1.46, height 1
AP6-00054 [mm]
  rect 1.7x0.35 smd: 1(-2.85,0.975) 2(-2.85,0.325) 3(-2.85,-0.325) 4(-2.85,-0.975) 5(2.85,-0.975) 6(2.85,-0.325) 7(2.85,0.325) 8(2.85,0.975)
  silkscreen extent -2.98,1.58 -2.73,1.82, body extent -3.23,-1.55 3.23,1.55, height 1.25
AP6-00071 [mm]
  rect 2.2x0.6 smd: 1(-2.4,1.905) 2(-2.4,0.635) 3(-2.4,-0.635) 4(-2.4,-1.905) 5(2.4,-1.905) 6(2.4,-0.635) 7(2.4,0.635) 8(2.4,1.905)
  silkscreen extent -3.87,-2.75 3.75,2.87, body extent -3,-2.45 3,2.45, height 1.75
AP6-00087 [mm]
  rect 1.05x0.65 smd: 1(-1.225,0.953) 2(-1.225,0) 3(-1.225,-0.953) 4(1.225,-0.953) 5(1.225,0.953)
  silkscreen extent -2,-1.75 2,1.75, body extent -1.5,-1.5 1.5,1.5, height 1.3
AP6-00097 [mm]
  rect 1.7x0.3 smd: 1(-2,1) 2(-2,0.5) 3(-2,0) 4(-2,-0.5) 5(-2,-1) 6(2,-1) 7(2,-0.5) 8(2,0) 9(2,0.5) 10(2,1)
  silkscreen extent -2.65,1.48 -2.4,1.73, body extent -2.45,-1.5 2.45,1.5, height 1.15
AP6-00118 [mm]
  oval 1.7x0.3 smd: 1(-10.6,8.75) 2(-10.6,8.25) 3(-10.6,7.75) 4(-10.6,7.25) 5(-10.6,6.75) 6(-10.6,6.25) 7(-10.6,5.75) 8(-10.6,5.25) 9(-10.6,4.75) 10(-10.6,4.25) 11(-10.6,3.75) 12(-10.6,3.25) 13(-10.6,2.75) 14(-10.6,2.25) 15(-10.6,1.75) 16(-10.6,1.25) 17(-10.6,0.75) 18(-10.6,0.25) 19(-10.6,-0.25) 20(-10.6,-0.75) 21(-10.6,-1.25) 22(-10.6,-1.75) 23(-10.6,-2.25) 24(-10.6,-2.75) 25(-10.6,-3.25) 26(-10.6,-3.75) 27(-10.6,-4.25) 28(-10.6,-4.75) 29(-10.6,-5.25) 30(-10.6,-5.75) 31(-10.6,-6.25) 32(-10.6,-6.75) 33(-10.6,-7.25) 34(-10.6,-7.75) 35(-10.6,-8.25) 36(-10.6,-8.75) 73(10.6,-8.75) 74(10.6,-8.25) 75(10.6,-7.75) 76(10.6,-7.25) 77(10.6,-6.75) 78(10.6,-6.25) 79(10.6,-5.75) 80(10.6,-5.25) 81(10.6,-4.75) 82(10.6,-4.25) 83(10.6,-3.75) 84(10.6,-3.25) 85(10.6,-2.75) 86(10.6,-2.25) 87(10.6,-1.75) 88(10.6,-1.25) 89(10.6,-0.75) 90(10.6,-0.25) 91(10.6,0.25) 92(10.6,0.75) 93(10.6,1.25) 94(10.6,1.75) 95(10.6,2.25) 96(10.6,2.75) 97(10.6,3.25) 98(10.6,3.75) 99(10.6,4.25) 100(10.6,4.75) 101(10.6,5.25) 102(10.6,5.75) 103(10.6,6.25) 104(10.6,6.75) 105(10.6,7.25) 106(10.6,7.75) 107(10.6,8.25) 108(10.6,8.75)
  oval 0.3x1.7 smd: 37(-8.75,-10.55) 38(-8.25,-10.55) 39(-7.75,-10.55) 40(-7.25,-10.55) 41(-6.75,-10.55) 42(-6.25,-10.55) 43(-5.75,-10.55) 44(-5.25,-10.55) 45(-4.75,-10.55) 46(-4.25,-10.55) 47(-3.75,-10.55) 48(-3.25,-10.55) 49(-2.75,-10.55) 50(-2.25,-10.55) 51(-1.75,-10.55) 52(-1.25,-10.55) 53(-0.75,-10.55) 54(-0.25,-10.55) 55(0.25,-10.55) 56(0.75,-10.55) 57(1.25,-10.55) 58(1.75,-10.55) 59(2.25,-10.55) 60(2.75,-10.55) 61(3.25,-10.55) 62(3.75,-10.55) 63(4.25,-10.55) 64(4.75,-10.55) 65(5.25,-10.55) 66(5.75,-10.55) 67(6.25,-10.55) 68(6.75,-10.55) 69(7.25,-10.55) 70(7.75,-10.55) 71(8.25,-10.55) 72(8.75,-10.55) 109(8.75,10.55) 110(8.25,10.55) 111(7.75,10.55) 112(7.25,10.55) 113(6.75,10.55) 114(6.25,10.55) 115(5.75,10.55) 116(5.25,10.55) 117(4.75,10.55) 118(4.25,10.55) 119(3.75,10.55) 120(3.25,10.55) 121(2.75,10.55) 122(2.25,10.55) 123(1.75,10.55) 124(1.25,10.55) 125(0.75,10.55) 126(0.25,10.55) 127(-0.25,10.55) 128(-0.75,10.55) 129(-1.25,10.55) 130(-1.75,10.55) 131(-2.25,10.55) 132(-2.75,10.55) 133(-3.25,10.55) 134(-3.75,10.55) 135(-4.25,10.55) 136(-4.75,10.55) 137(-5.25,10.55) 138(-5.75,10.55) 139(-6.25,10.55) 140(-6.75,10.55) 141(-7.25,10.55) 142(-7.75,10.55) 143(-8.25,10.55) 144(-8.75,10.55)
  silkscreen extent -12.5,-12.5 12.5,12.5, body extent -11,-11 11,11, height 1.71
AP6-00186 [mm] "8M2, 8-lead 2.0x3.0 mm Body, 0.50 mm Pitch,  WDFN, Very Very Thin, Dual No Lead Package"
  round 0.264 on Top Paste: 0(-0.425,-0.4) 0(-0.425,0.4) 0(0,0) 0(0.425,-0.4) 0(0.425,0.4)
  rect 0.85x0.3 smd: 1(-1.475,0.75) 2(-1.475,0.25) 3(-1.475,-0.25) 4(-1.475,-0.75) 5(1.475,-0.75) 6(1.475,-0.25) 7(1.475,0.25) 8(1.475,0.75)
  rect 1.3x1.4 smd paste-0.7: 9(0,0)
  silkscreen extent -2.26,-1.3 2.2,1.33, body extent -1.53,-1 1.53,1, height 0.76